# Altium PCB TivaC.PcbDoc (part 1 of 3)
Units mil, origin at the board's own origin, x right, y up, seen from the top; angles counter-clockwise.
Board outline 2000 x 2600 mil, 6 copper layers (L1, L2(GND), L3, L4, L5(PWR), L6), stack 61.068 mil thick; 95 components, 90 nets, 380 pads, 190 vias.
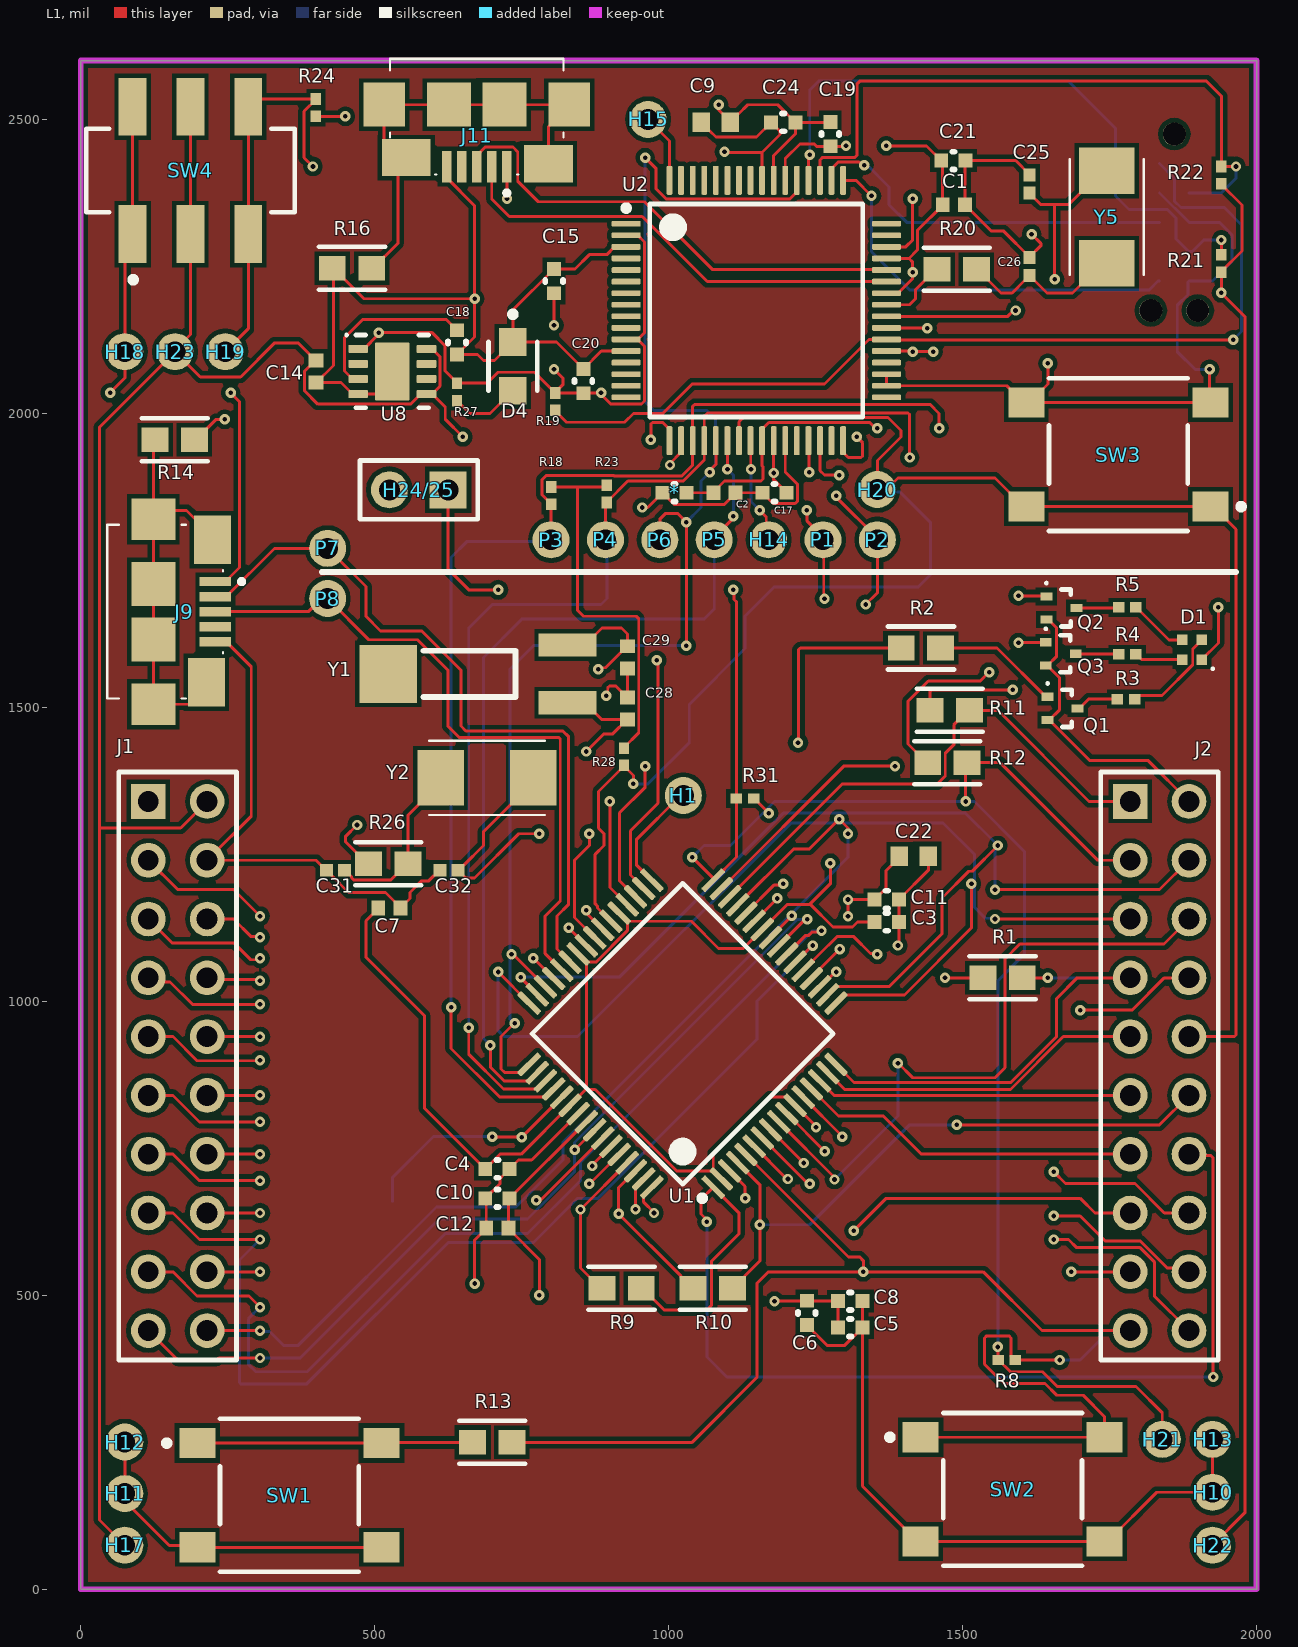
[diagram p0: L1 view]
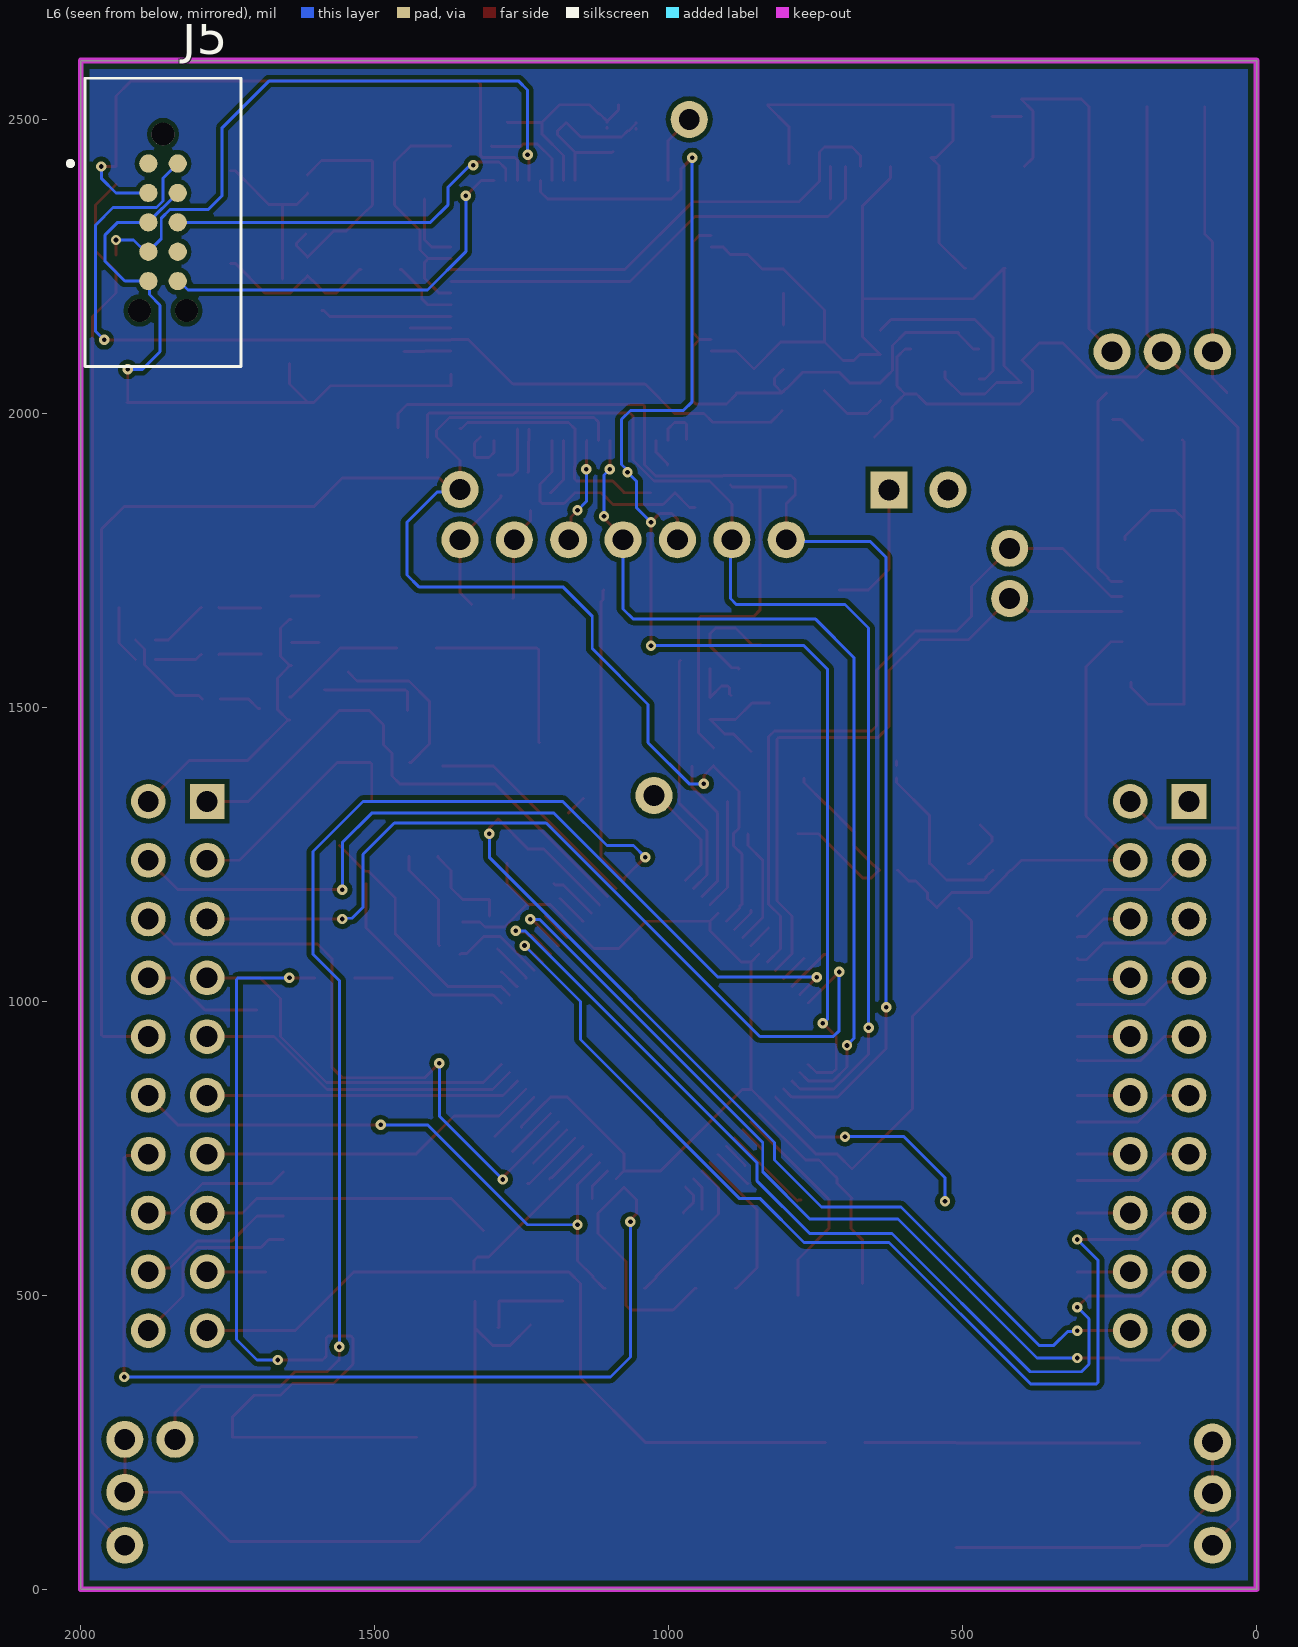
[diagram p1: L6 view, seen from below]
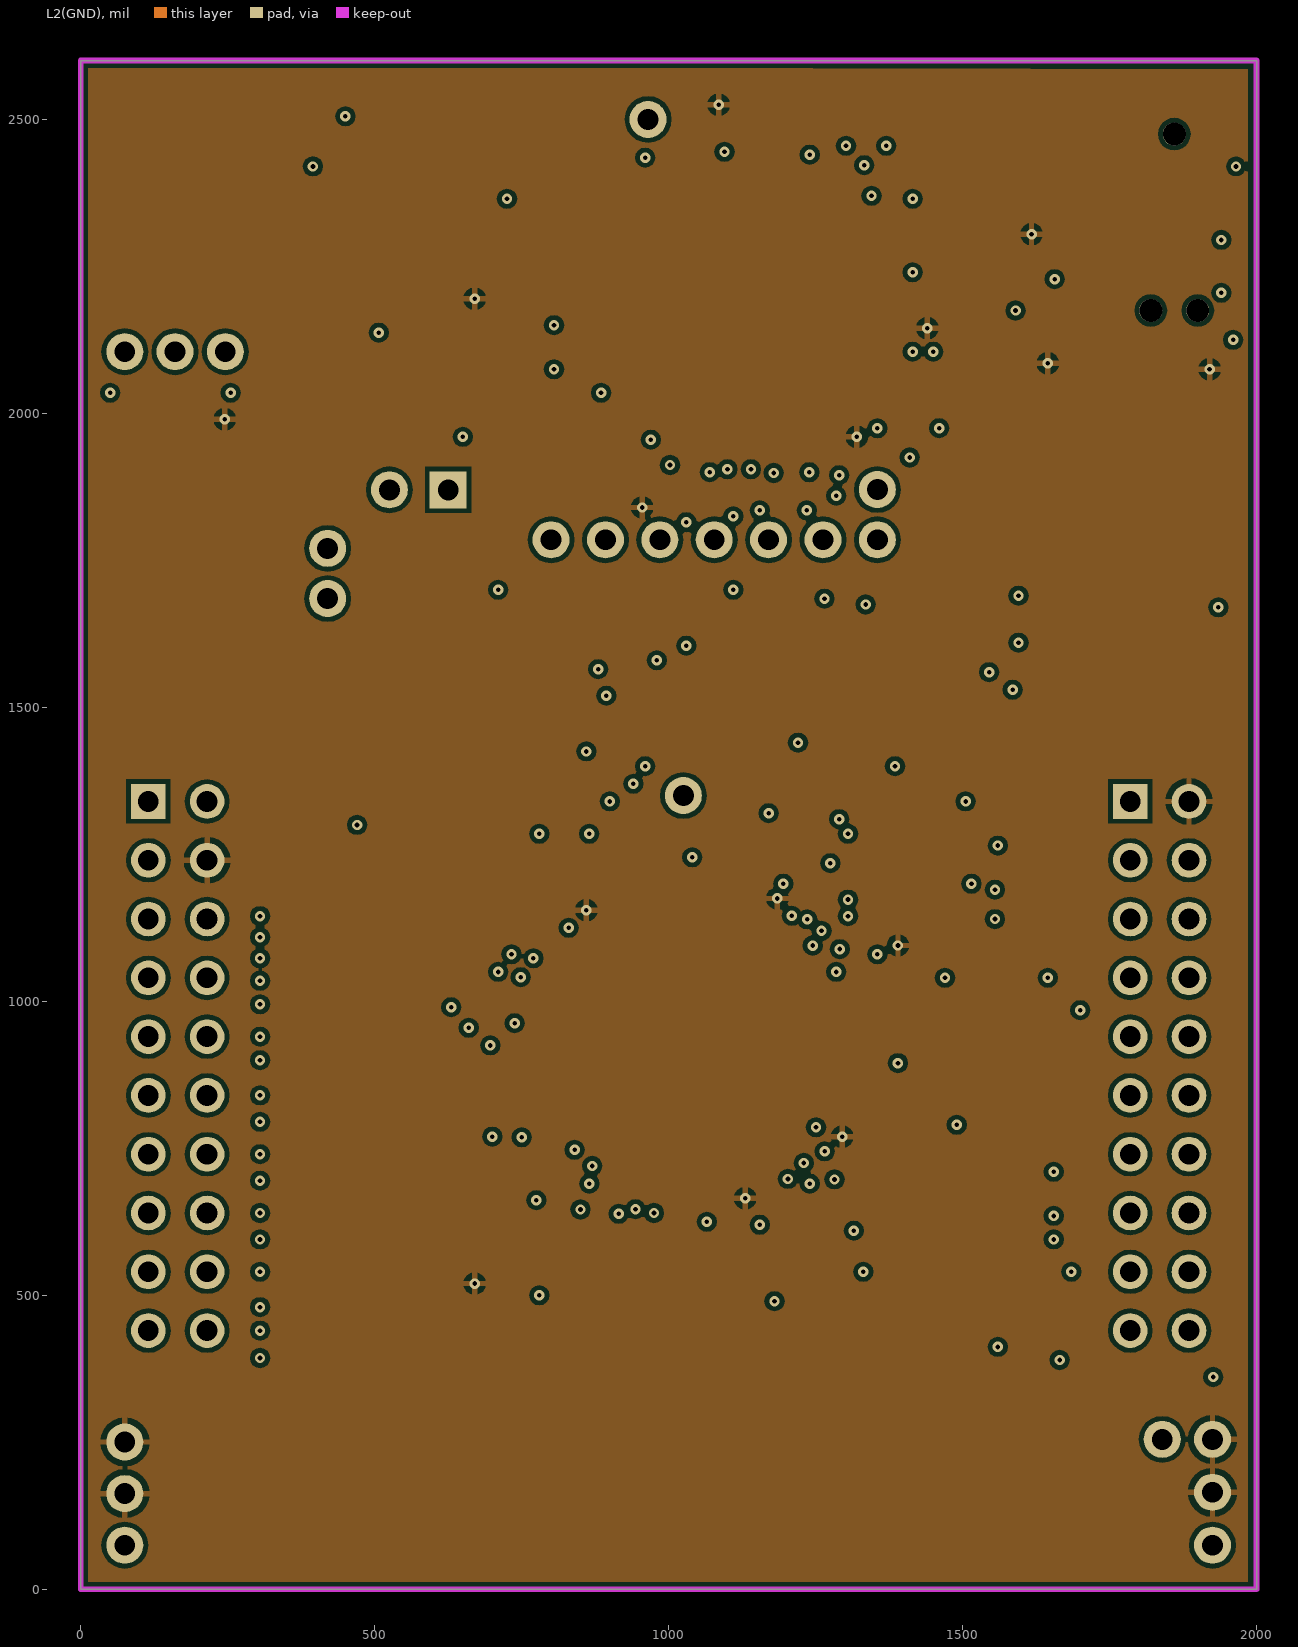
[diagram p2: L2(GND)]
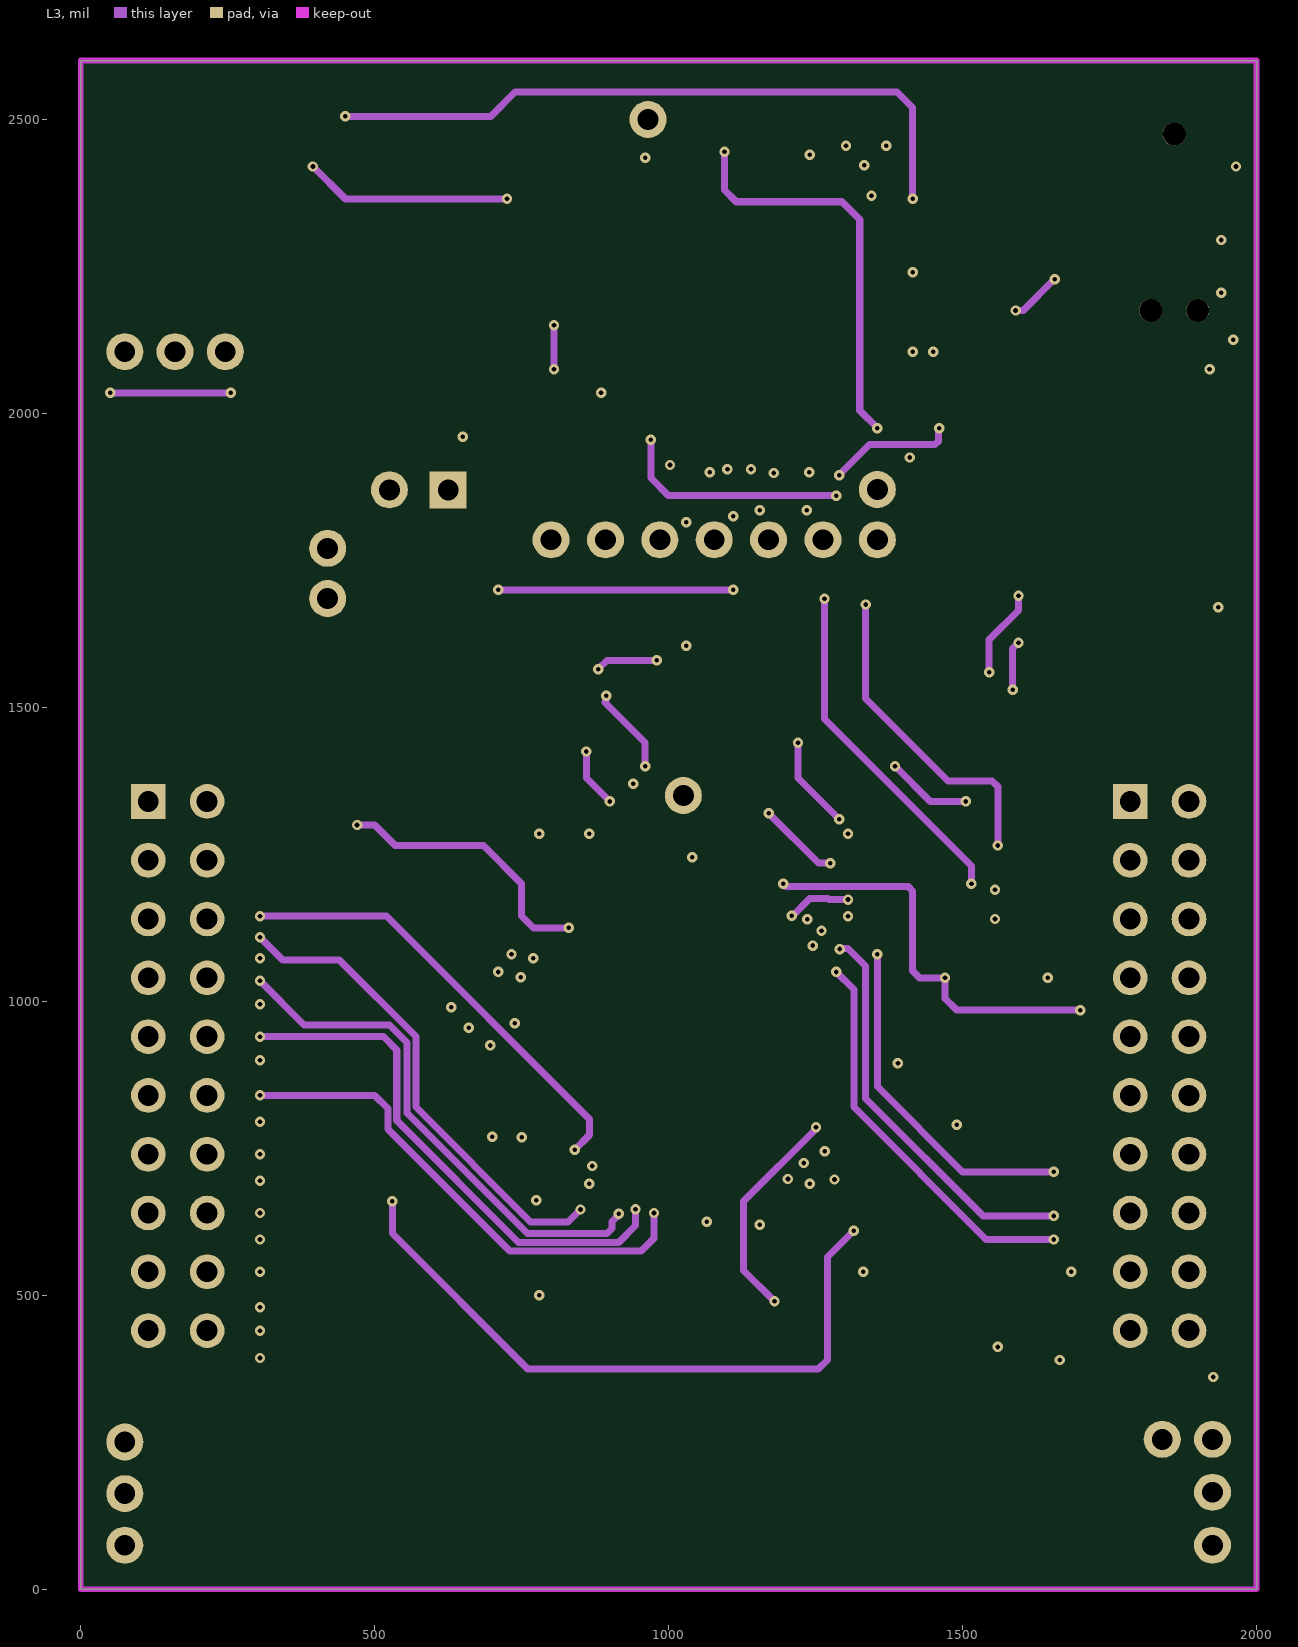
[diagram p3: L3]
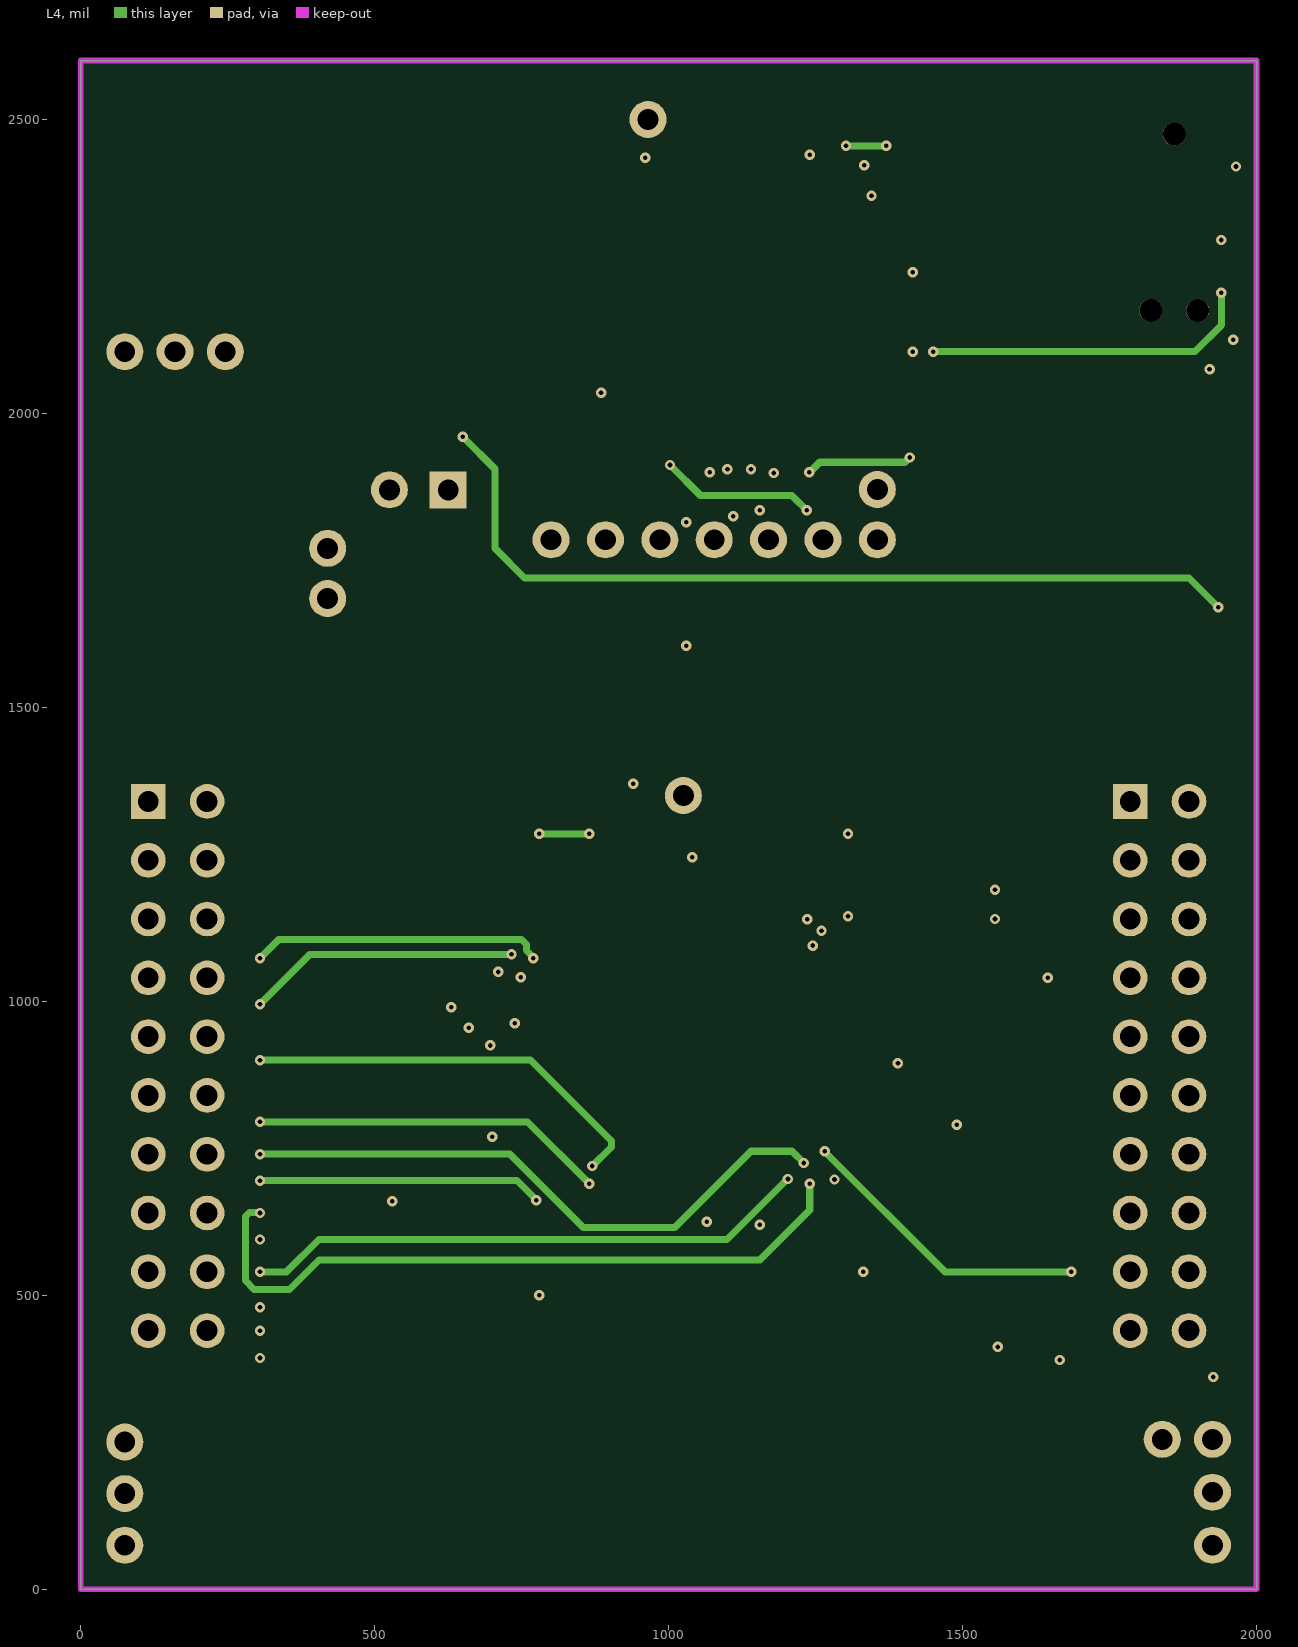
[diagram p4: L4]
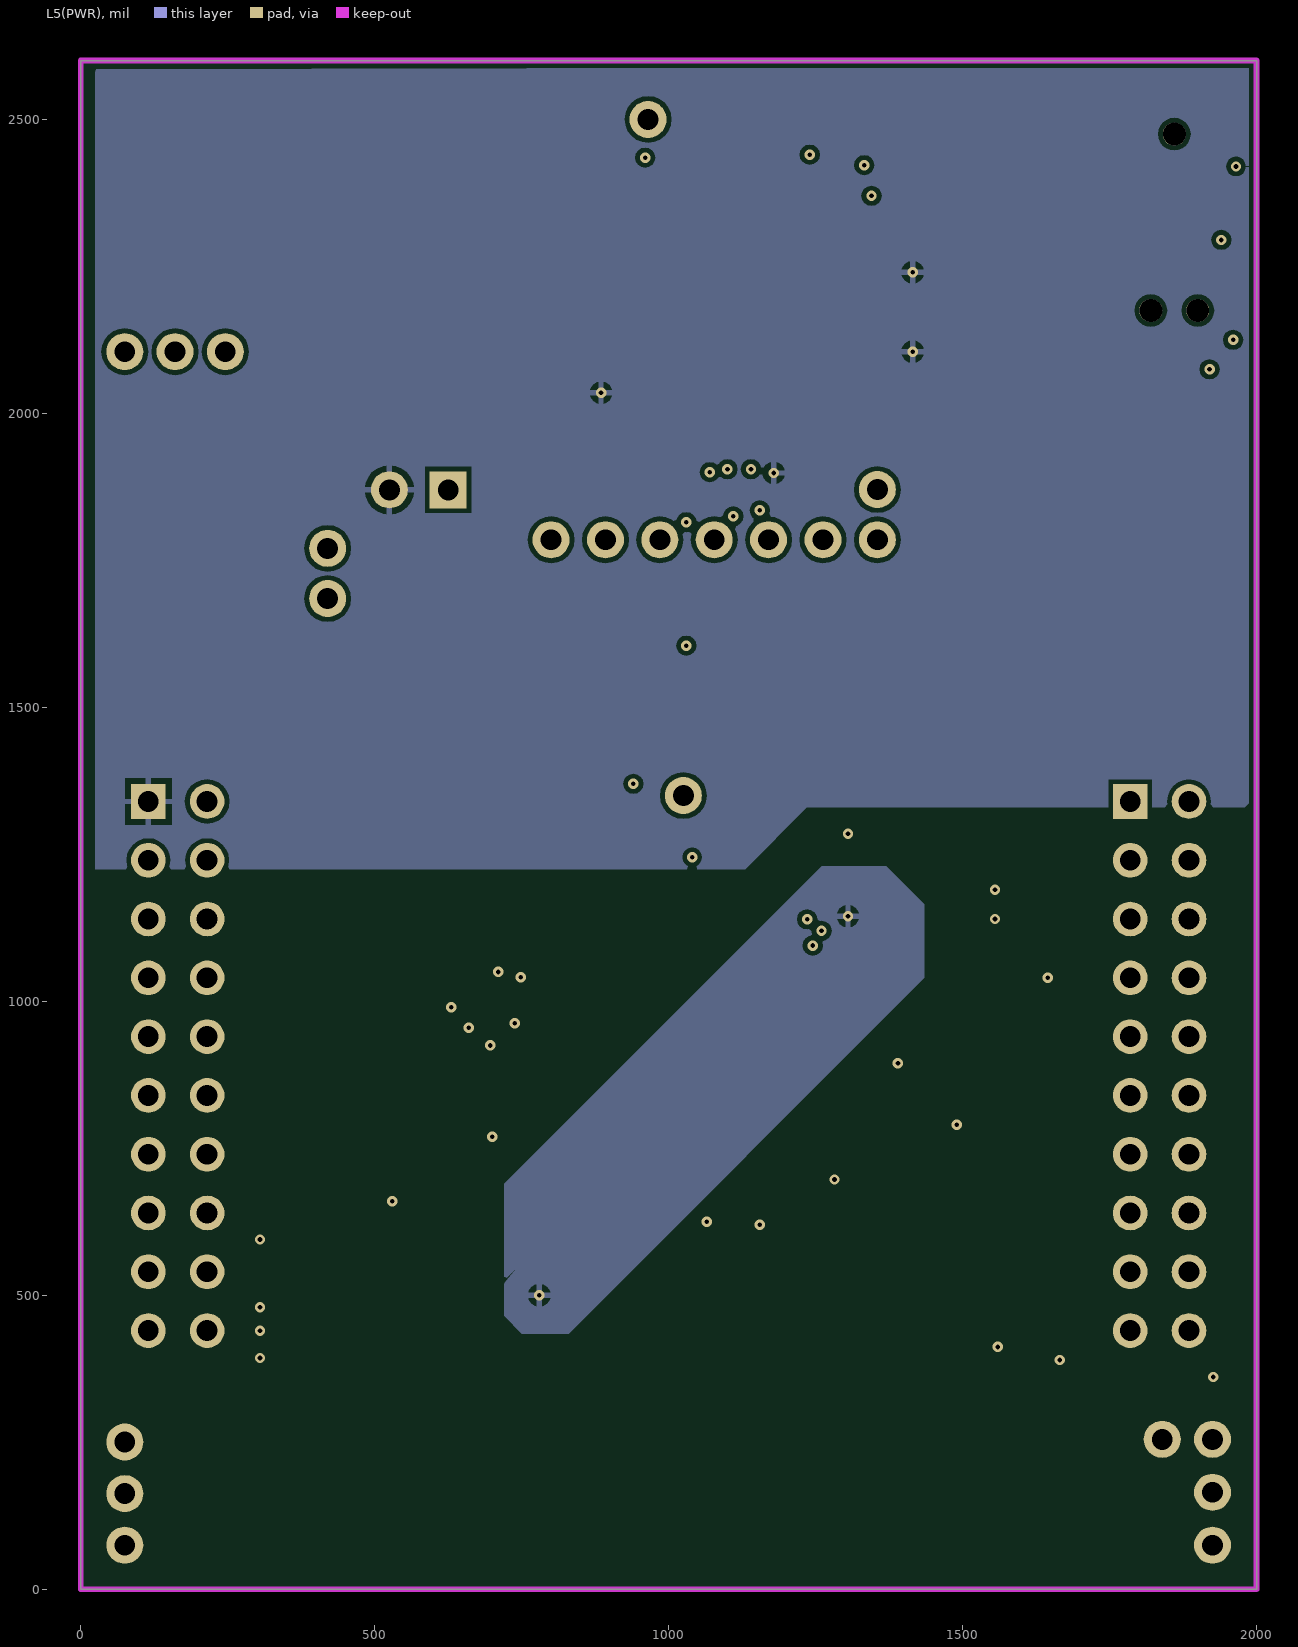
[diagram p5: L5(PWR)]

## Layer stack, top to bottom
Top Solder: solder mask 1, SM-001, Dk 4
L1: signal copper 1.378
Dielectric 1: prepreg 2.8, PP-006, Dk 4.1
Dielectric 2: prepreg 2.8, PP-006, Dk 4.1
L2(GND): signal copper 1.378
Dielectric 3: core 18, Core-035, Dk 4.7
L3: signal copper 1.378
Dielectric 4: prepreg 2.8, PP-006, Dk 4.1
Dielectric 5: prepreg 2.8, PP-006, Dk 4.1
L4: signal copper 1.378
Dielectric 6: core 18, Core-035, Dk 4.7
L5(PWR): signal copper 1.378
Dielectric 7: prepreg 2.8, PP-006, Dk 4.1
Dielectric 8: prepreg 2.8, PP-006, Dk 4.1
L6: signal copper 1.378
Bottom Solder: solder mask 1, SM-001, Dk 4

## Board outline
0,0 0,2600 2000,2600 2000,0

## Design rules (kind name [scope] priority, off if disabled: settings)
Clearance [All] p1: gap=7.87 ignorepadtopadclearanceinfootprint=FALSE except(0: Arc-Text Track-Text SMDPad-Text THPad-Text Via-Text Fill-Text Poly-Text Region-Text Text-Text; 3: Arc-Arc Arc-Track Track-Track; 4: Arc-SMDPad Track-SMDPad; 5.91: SMDPad-SMDPad; 7: Arc-Via Track-Via; 9: Arc-THPad Track-THPad; 15.75: THPad-THPad)
HoleSize [All] p1: absolutevalues=TRUE maxlimit=255.91 minlimit=5.91 maxpercent=80.000 minpercent=20.000
HoleToHoleClearance [All] p1: gap=12 allowstackedmicrovias=TRUE
MinimumAnnularRing [All] p1: minimumring=3.5
MinimumSolderMaskSliver [All] p1: minsoldermaskwidth=1
PolygonConnect [All] p1: connectstyle=Relief reliefconductorwidth=10 reliefentries=4 polygonreliefangle="90 Angle" airgapwidth=10
RoutingVias [All] p1: holewidth=7.87 width=17.72 viastyle="Through Hole" minholewidth=7.87 minwidth=17.72 maxholewidth=19.68 maxwidth=50
SilkToSilkClearance [All] p1: silktosilkclearance=6
SilkToSolderMaskClearance [IsPad] p1: minsilkscreentomaskgap=3.5 clearancetoexposedcopper=TRUE
SolderMaskExpansion [All] p1: expansion=4 istentingtop=FALSE
UnRoutedNet [All] p1: checkbadconnections=TRUE
Width "Width All" [All] p1: maxlimit=12 minlimit=5 preferedwidth=12 toplayer_maxwidth=5 toplayer_prefwidth=5 midlayer1_minwidth=12 midlayer2_minwidth=12 midlayer3_maxwidth=5 midlayer3_prefwidth=5 midlayer4_maxwidth=5 midlayer4_prefwidth=5 bottomlayer_maxwidth=5 bottomlayer_prefwidth=5 minimp=50.000000 maximp=50.000000 favimp=50.000000
24 further rules are at their usual default settings.

## Classes and differential pairs
component class Designator: C3 C4 C5 C6 C7 C8 C11 C14 C18 C22 C28 C29 C31 C32 D4 H1 H10 H11 H12 H13 H17 H18 H19 H20 H21 H22 H23 H24/25 R26 R27 R28 R31 SW3 SW4 U8 Y1 Y2
component class Designator: D1 J1 J2 J9 P1 P2 P3 P4 P5 P6 P7 P8 Q1 Q2 Q3 R1 R2 R3 R4 R5 R8 R9 R10 R11 R12 R13 R14 SW1 SW2 U1
component class Designator: C1 C2 C9 C15 C17 C19 C20 C21 C24 C25 C26 H14 H15 J5 J11 R16 R18 R19 R20 R21 R22 R23 R24 U2 Y5

## Components (designator, comment, footprint, x,y, rotation, side; value= is the part's Value field where it differs from the comment)
* "EMK105B7104KV-F" CAPC1005 1010,1865 r180 top (schematic designator C23)
C1 "capacitor Johanson Dielectrics Inc" "C0402 imperial" 1485,2355 r0 top
C2 "capacitor Johanson Dielectrics Inc" "C0402 imperial" 1094.88,1865 r0 top
C3 "EMK105B7103KV-F" CAPC1005 1371,1135 r0 top
C4 "EMK105B7104KV-F" CAPC1005 708.66,714.93 r0 top
C5 "EMK105B7103KV-F" CAPC1005 1309,445 r0 top
C6 "EMK105B7104KV-F" CAPC1005 1235,470 r270 top
C7 "capacitor Johanson Dielectrics Inc" "C0402 imperial" 525,1158.79 r0 top
C8 "EMK105B7103KV-F" CAPC1005 1309,490 r0 top
C9 "GRM188R61C225KE15D" CAPC1608X90X35LL10T15 1080,2495 r0 top
C10 "EMK105B7104KV-F" CAPC1005 708.66,664.92 r180 top
C11 "EMK105B7104KV-F" CAPC1005 1371,1173 r0 top
C12 "capacitor Johanson Dielectrics Inc" "C0402 imperial" 708.66,614.24 r180 top
C14 "capacitor Johanson Dielectrics Inc" "C0402 imperial" 400,2071.34 r270 top
C15 "EMK105B7103KV-F" CAPC1005 805,2225 r90 top
C17 "EMK105B7104KV-F" CAPC1005 1180,1865 r180 top
C18 "EMK105B7103KV-F" CAPC1005 640,2120.67 r270 top
C19 "EMK105B7103KV-F" CAPC1005 1275,2475 r90 top
C20 "EMK105B7104KV-F" CAPC1005 855,2055 r90 top
C21 "EMK105B7103KV-F" CAPC1005 1484.33,2430 r0 top
C22 "GRM188R61C225KE15D" CAPC1608X90X35LL10T15 1417,1247 r0 top
C24 "EMK105B7104KV-F" CAPC1005 1195,2495 r0 top
C25 "GRM1555C1H100JZ01D" CAPC1005X55X25LL05T10 1613.93,2390.35 r90 top
C26 "GRM1555C1H100JZ01D" CAPC1005X55X25LL05T10 1613.93,2250 r90 top
C28 "Capacitor" "C0402 imperial" 930,1498.22 r90 top
C29 "Capacitor" "C0402 imperial" 930,1585 r90 top
C31 "GRM1555C1H100JZ01D" CAPC1005X55X25LL05T10 433.19,1223 r180 top
C32 "GRM1555C1H100JZ01D" CAPC1005X55X25LL05T10 626.19,1223 r180 top
D1 "RSGHBHC1" "RGB LED" 1890,1598 r0 top
D4 "Green" FP-LTST-C171GKT-MFG 735,2080 r270 top
H1 "header" "HEADER 1"#1 1025,1350 r0 top
H10 "header" "HEADER 1"#1 1925,165 r0 top
H11 "header" "HEADER 1"#1 75,162.72 r0 top
H12 "header" "HEADER 1"#1 75,250.44 r0 top
H13 "header" "HEADER 1"#1 1925,255 r0 top
H14 "header" "HEADER 1"#1 1170,1785 r0 top
H15 "header" "HEADER 1"#1 965,2500 r0 top
H17 "header" "HEADER 1"#1 75,75 r0 top
H18 "header" "HEADER 1"#1 75,2105 r0 top
H19 "header" "HEADER 1"#1 245.89,2105 r0 top
H20 "header" "HEADER 1"#1 1355,1870.44 r90 top
H21 "header" "HEADER 1"#2 1868.56,196 r0 top
H22 "header" "HEADER 1"#1 1925,75 r90 top
H23 "header" "HEADER 1"#1 160.44,2105 r90 top
H24/25 "Header 2" HDR1X2 625,1870 r180 top
J1 "Header 20" HDR2X10 115,1340 r270 top
J2 "Header 20" HDR2X10 1785,1340 r270 top
J5 "TC2050-IDC-NL" TAG-CONNECT_TC2050-IDC-NL 1885,2425 r180 bottom
J9 "ZX62-B-5PA" ZX62B5PA 123.54,1662.76 r270 top
J11 "ZX62-B-5PA" ZX62B5PA 673.56,2525 r180 top
P1 "header" "HEADER 1"#1 1262.5,1785 r0 top
P2 "header" "HEADER 1"#1 1355,1785 r0 top
P3 "header" "HEADER 1"#1 800,1785 r0 top
P4 "header" "HEADER 1"#1 892.5,1785 r0 top
P5 "header" "HEADER 1"#1 1077.5,1785 r0 top
P6 "header" "HEADER 1"#1 985,1785 r0 top
P7 "header" "HEADER 1"#1 420,1770.44 r0 top
P8 "header" "HEADER 1"#1 420,1685 r0 top
Q1 "DTC114EET1G" ONSC-SC-75-3-463-01_V 1670,1498.19 r0 top
Q2 "DTC114EET1G" ONSC-SC-75-3-463-01_V 1668,1669 r0 top
Q3 "DTC114EET1G" ONSC-SC-75-3-463-01_V 1667,1591 r0 top
R1 "ERJ-3GEY0R00V" FP-ERJ-3GEY0R00V-IPC_A 1568,1040 r0 top
R2 "ERJ-3GEY0R00V" FP-ERJ-3GEY0R00V-IPC_A 1429,1601 r0 top
R3 "RC0402FR-07330RL" RESC1005X40X25LL05T10 1778,1514 r0 top
R4 "RC0402FR-07330RL" RESC1005X40X25LL05T10 1780,1590 r0 top
R5 "RC0402FR-07330RL" RESC1005X40X25LL05T10 1780,1670 r0 top
R8 "RC0402FR-07330RL" RESC1005X40X25LL05T10 1575,390 r180 top
R9 "ERJ-3GEY0R00V" FP-ERJ-3GEY0R00V-IPC_A 920,512 r180 top
R10 "ERJ-3GEY0R00V" FP-ERJ-3GEY0R00V-IPC_A 1075,512 r180 top
R11 "ERJ-3GEY0R00V" FP-ERJ-3GEY0R00V-IPC_A 1478,1495 r180 top
R12 "ERJ-3GEY0R00V" FP-ERJ-3GEY0R00V-IPC_A 1474,1406 r180 top
R13 "ERJ-3GEY0R00V" FP-ERJ-3GEY0R00V-IPC_A 700,250 r180 top
R14 "ERJ-3GEY0R00V" FP-ERJ-3GEY0R00V-IPC_A 160,1955 r0 top
R16 "ERJ-3GEY0R00V" FP-ERJ-3GEY0R00V-IPC_A 461.51,2246.92 r180 top
R18 "RC0402FR-0710KL" RESC1005X40X25LL05T10 800,1860 r270 top
R19 "RC0402FR-0710KL" RESC1005X40X25LL05T10 807.02,2020 r270 top
R20 "ERJ-3GEY0R00V" FP-ERJ-3GEY0R00V-IPC_A 1490,2245 r0 top
R21 "RC0402FR-0710KL" RESC1005X40X25LL05T10 1940,2255 r90 top
R22 "RC0402FR-0710KL" RESC1005X40X25LL05T10 1940,2405.24 r90 top
R23 "RC0402FR-0710KL" RESC1005X40X25LL05T10 895,1863.24 r270 top
R24 "RC0402FR-07330RL" RESC1005X40X25LL05T10 400,2520 r270 top
R26 "ERJ-3GEY0R00V" FP-ERJ-3GEY0R00V-IPC_A 523.19,1234 r0 top
R27 "RC0402FR-07330RL" RESC1005X40X25LL05T10 640,2036.57 r90 top
R28 "RC0402FR-0710KL" RESC1005X40X25LL05T10 924,1416 r90 top
R31 "MCR01MRTF1004" RESC1005X40X25LL05T10 1130,1345 r180 top
SW1 "B3S-1000" OMRON-B3S-1000-4_V 355,160 r0 top
SW2 "B3S-1000" OMRON-B3S-1000-4_V 1585,170 r0 top
SW3 "B3S-1000" OMRON-B3S-1000-4_V 1765,1930 r180 top
SW4 "JS202011SCQN" FP-JS202011SCQN-MFG 186.57,2413.27 r0 top
U1 "TM4C123GH6PMIR" PM0064A_L 1023.62,944.88 r135 top
U2 "TM4C123GH6PMIR" PM0064A_L 1149.12,2175 r0 top
U8 "TPS73633DRBT" DRB0008A_V 530,2071.34 r0 top
Y1 "AB26TRB-32.768KHZ-T" AB26TRB 523,1557 r0 top
Y2 "NX5032GA-16.000000MHZ" NX5032GA16000000MHZLNCD1 691,1380 r0 top
Y5 "NX5032GA-16.000000MHZ" NX5032GA16000000MHZLNCD1 1745,2333.99 r90 top

## Footprints (in the part's own frame and the unit in brackets; to place one, negate y for a bottom-side part, rotate by r counter-clockwise, add the part's x,y. Pads: shape width x height; smd on the part's side, far side on the other; paste and mask are expansions set on the pad)
AB26TRB [mm]
  rect 2.5x1 smd: 1(7.75,-1.25) 2(7.75,1.25)
  rect 2.5x2.5 smd: 3(0,0)
  silkscreen extent 1.53,-1 5.5,1, body extent -0.67,-1.4 8.33,1.4, height 2
"C0402 imperial" [mm] "Chip Capacitor, 2-Leads, Body 1.00x0.50mm, IPC Medium Density"
  rect 0.6x0.64 smd: 1(-0.48,0) 2(0.48,0)
  body extent -0.5,-0.25 0.5,0.25, height 0.35
CAPC1005 [mm] "Chip Capacitor 1005"
  rect 0.6x0.6 smd: 1(-0.525,0) 2(0.525,0)
  silkscreen extent -0.05,-0.38 0.05,0.38, body extent -0.57,-0.3 0.57,0.3, height 0.2
CAPC1005X55X25LL05T10 [mm] "Chip Capacitor, 2-Leads, Body 1.00x0.50mm, IPC High Density"
  rect 0.56x0.52 smd: 1(-0.39,0) 2(0.39,0)
  body extent -0.53,-0.28 0.53,0.28, height 0.55
CAPC1608X90X35LL10T15 [mm] "Chip Capacitor, 2-Leads, Body 1.60x0.80mm, IPC High Density"
  rect 0.75x0.85 smd: 1(-0.625,0) 2(0.625,0)
  body extent -0.85,-0.45 0.85,0.45, height 0.9
DRB0008A_V [mm] "SON, 8-Leads, Body 3x3mm, Pitch 0.65mm, Thermal Pad 1.50 x 3.8mm"
  rrect29% 0.85x0.35 smd: 1(-1.475,0.975) 2(-1.475,0.325) 3(-1.475,-0.325) 4(-1.475,-0.975) 5(1.475,-0.975) 6(1.475,-0.325) 7(1.475,0.325) 8(1.475,0.975)
  rrect7% 1.5x2.5 smd: 9(0,0)
  silkscreen extent -2.02,-1.58 1.57,1.62, body extent -1.5,-1.5 1.5,1.5, height 1
FP-ERJ-3GEY0R00V-IPC_A [mil]
  rect 45.53x41.82 smd paste+0 mask+0: 1(-33.5,0) 2(33.5,0)
  silkscreen extent -56,-37 56,37, body extent -76,-41 76,41, height 10
FP-JS202011SCQN-MFG [mm]
  rect 1.2x2.5 smd paste+0 mask+0: 1(-2.5,-2.75) 2(0,-2.75) 3(2.5,-2.75) 4(-2.5,2.75) 5(0,2.75) 6(2.5,2.75)
  silkscreen extent -4.5,-4.85 4.5,1.8, body extent -4.5,-3.63 4.5,3.37, height 5.65
FP-LTST-C171GKT-MFG [mm]
  rect 1.2x1.2 smd paste+0 mask+0: 1(-1.05,0) 2(1.05,0)
  silkscreen extent -2.37,-1.05 1.05,1.05, body extent -1.75,-0.77 1.75,0.77, height 0.25
HDR1X2 [mm] "Connector; Header; 2 Position"
  rect 1.6x1.6 hole 0.9: 1(0,0)
  round 1.6 hole 0.9: 2(2.54,0)
  silkscreen extent -1.27,-1.27 3.81,1.27, body extent -1.36,-1.27 3.84,1.27, height 8.6
HDR2X10 [mm] "Connector; Header; 10x2 Position"
  rect 1.5x1.5 hole 0.9: 1(0,0)
  round 1.5 hole 0.9: 2(0,2.54) 3(2.54,0) 4(2.54,2.54) 5(5.08,0) 6(5.08,2.54) 7(7.62,0) 8(7.62,2.54) 9(10.16,0) 10(10.16,2.54) 11(12.7,0) 12(12.7,2.54) 13(15.24,0) 14(15.24,2.54) 15(17.78,0) 16(17.78,2.54) 17(20.32,0) 18(20.32,2.54) 19(22.86,0) 20(22.86,2.54)
  silkscreen extent -1.27,-1.27 24.13,3.81, body extent -1.27,-1.27 24.13,3.81, height 8.64
"HEADER 1"#1 [mm]
  round 1.6 hole 0.9: 1(0,0)
"HEADER 1"#2 [mm]
  round 1.6 hole 0.9: 1(-0.737,1.499)
NX5032GA16000000MHZLNCD1 [mm]
  rect 2x2.4 smd: 1(-2,0) 2(2,0)
  silkscreen extent -2.5,-1.6 2.5,1.6, body extent -2.8,-1.6 2.8,1.6, height 1.6
OMRON-B3S-1000-4_V [mm] "SMD, 4-Leads, Body 6.6x6mm"
  rect 1.55x1.3 smd: 1(-3.975,2.25) 2(3.975,2.25) 3(-3.975,-2.25) 4(3.975,-2.25)
  silkscreen extent -5.42,-3.3 3,3.3, body extent -4.5,-3.3 4.5,3.3, height 4.4
ONSC-SC-75-3-463-01_V [mil] "SOT23, 3-Leads, Body 1.6x0.8mm, Pitch 0.5mm"
  rect 20x14.02 smd: 1(-25.49,19.68) 2(-25.49,-19.69) 3(25.49,0)
  silkscreen extent -27,-31 16,44, body extent -16,-31 16,31, height 35
PM0064A_L [mm] "QFP, 64-Leads, Body 10x10mm, Pitch 0.5mm, IPC High Density"
  rrect40% 1.25x0.25 smd: 1(-5.625,3.75) 2(-5.625,3.25) 3(-5.625,2.75) 4(-5.625,2.25) 5(-5.625,1.75) 6(-5.625,1.25) 7(-5.625,0.75) 8(-5.625,0.25) 9(-5.625,-0.25) 10(-5.625,-0.75) 11(-5.625,-1.25) 12(-5.625,-1.75) 13(-5.625,-2.25) 14(-5.625,-2.75) 15(-5.625,-3.25) 16(-5.625,-3.75) 33(5.625,-3.75) 34(5.625,-3.25) 35(5.625,-2.75) 36(5.625,-2.25) 37(5.625,-1.75) 38(5.625,-1.25) 39(5.625,-0.75) 40(5.625,-0.25) 41(5.625,0.25) 42(5.625,0.75) 43(5.625,1.25) 44(5.625,1.75) 45(5.625,2.25) 46(5.625,2.75) 47(5.625,3.25) 48(5.625,3.75)
  rrect40% 0.25x1.25 smd: 17(-3.75,-5.625) 18(-3.25,-5.625) 19(-2.75,-5.625) 20(-2.25,-5.625) 21(-1.75,-5.625) 22(-1.25,-5.625) 23(-0.75,-5.625) 24(-0.25,-5.625) 25(0.25,-5.625) 26(0.75,-5.625) 27(1.25,-5.625) 28(1.75,-5.625) 29(2.25,-5.625) 30(2.75,-5.625) 31(3.25,-5.625) 32(3.75,-5.625) 49(3.75,5.625) 50(3.25,5.625) 51(2.75,5.625) 52(2.25,5.625) 53(1.75,5.625) 54(1.25,5.625) 55(0.75,5.625) 56(0.25,5.625) 57(-0.25,5.625) 58(-0.75,5.625) 59(-1.25,5.625) 60(-1.75,5.625) 61(-2.25,5.625) 62(-2.75,5.625) 63(-3.25,5.625) 64(-3.75,5.625)
  silkscreen extent -5.75,-4.6 4.6,4.6, body extent -6,-6 6,6, height 1.49
RESC1005X40X25LL05T10 [mm] "Chip Resistor, 2-Leads, Body 1.00x0.50mm, IPC High Density"
  rect 0.5x0.45 smd: 1(-0.375,0) 2(0.375,0)
  body extent -0.53,-0.27 0.53,0.28, height 0.4
"RGB LED" [mm]
  rect 0.45x0.45 smd: 1(0.425,-0.425) 2(0.425,0.425) 3(-0.425,0.425) 4(-0.425,-0.425)
  silkscreen extent 0.85,-0.87 0.95,-0.77, body extent -0.5,-0.5 0.5,0.5, height 0.35
TAG-CONNECT_TC2050-IDC-NL [mm]
  round 0.787 smd paste-1: 1(0,0) 2(0,-1.27) 3(0,-2.54) 4(0,-3.81) 5(0,-5.08) 6(1.27,-5.08) 7(1.27,-3.81) 8(1.27,-2.54) 9(1.27,-1.27) 10(1.27,0)
  round 0.991 hole 0.991 unplated: ""(-0.38,-6.35) ""(0.635,1.27) ""(1.65,-6.35)
  silkscreen extent -3.46,-8.76 4,3.68
ZX62B5PA [mm]
  rect 0.4x1.35 smd: 1(-1.3,2.675) 2(-0.65,2.675) 3(0,2.675) 4(0.65,2.675) 5(1.3,2.675)
  rect 2.1x1.6 smd: S1(-3.1,2.549) S2(3.048,2.286)
  rect 1.8x1.9 smd: S3(-4,0) S6(4,0)
  rect 1.9x1.9 smd: S4(-1.2,0) S5(1.2,0)
  silkscreen extent -3.75,-1.99 3.75,3.91, body extent -4.04,-2.55 4.04,3.05, height 2.73

## Part data
* C4 C6 C10 C11 C17 C20 C24: "TAIYO YUDEN - EMK105B7104KV-F - SMD Multilayer Ceramic Capacitor, 0.1 &#181;F, 16 V, 0402 [1005 Metric], &#177; 10%, X7R, M Series", Capacitance=100nF, Case Code (Imperial)=0402, Case Code (Metric)=1005, Dielectric=X7R, Manufacturer="Taiyo Yuden", Max Operating Temperature=125°C, Min Operating Temperature=-55°C, Package Quantity=1, Resistor Type=Ceramic, Supplier Part Number 1=587-1451-1-ND, Tolerance=10%, Voltage Rating=16V, Case/Package=0402, ComponentLink1Description=https://datasheet.ciiva.com/129/emk105b7104kv-f-ss-129714.pdf?src-supplier=Digi-Key, ComponentLink1URL=https://datasheet.ciiva.com/129/emk105b7104kv-f-ss-129714.pdf?src-supplier=Digi-Key, ComponentLink2Description=https://datasheet.ciiva.com/30227/emk105b7104kv-f-30227394.pdf?src-supplier=Onlinecomponents.com, ComponentLink2URL=https://datasheet.ciiva.com/30227/emk105b7104kv-f-30227394.pdf?src-supplier=Onlinecomponents.com, ComponentLink3Description=https://datasheet.ciiva.com/22748/746258-22748959.pdf?src-supplier=Element14, ComponentLink3URL=https://datasheet.ciiva.com/22748/746258-22748959.pdf?src-supplier=Element14, Construction=Flat, Depth=0.5mm, Halogen Free="Halogen Free", Height=0.5mm, Lead Free="Lead Free", Length=1mm, Manufacturer Part Number=EMK105B7104KV-F, Mount="Surface Mount", Number of Pins=2, Packaging="Tape and Reel", Pricing 1="1 = 0.10000, 10 = 0.02400, 50 = 0.01320, 100 = 0.01070, 500 = 0.00764, 1000 = 0.00601, 2500 = 0.00546, 5000 = 0.00503 (USD)", Radiation Hardening=No, REACH SVHC=Unknown, RoHS=Yes, RoHS Compliant=Yes, Series=M, Stock 1=5046270, Supplier 1=Digi-Key, Termination=SMD/SMT, Thickness=0.022inch, Voltage Rating (DC)=16V, Width=0.02inch
C1 C2 C7 C12 C14: library part 100R07X105KV4T, "Cap Ceramic 1uF 10V X5R 10% SMD 0402 85C T/R", Capacitance=1uF, Case Code (Imperial)=0402, Case Code (Metric)=1005, Dielectric=X5R, Manufacturer=Johanson, Max Operating Temperature=85°C, Min Operating Temperature=-55°C, Package Quantity=10000, Supplier Part Number 1=605-100R07X105KV4T, Tolerance=10%, Voltage Rating=10V, Case/Package=0402, ComponentLink1Description=https://datasheet.ciiva.com/26948/getdatasheetpartid-789067-26948543.pdf?src-supplier=Verical, ComponentLink1URL=https://datasheet.ciiva.com/26948/getdatasheetpartid-789067-26948543.pdf?src-supplier=Verical, ComponentLink2Description=https://datasheet.ciiva.com/22693/jdi-full-catalog-2012-01-22693744.pdf?src-supplier=Element14, ComponentLink2URL=https://datasheet.ciiva.com/22693/jdi-full-catalog-2012-01-22693744.pdf?src-supplier=Element14, Depth=0.51mm, Height=0.64mm, Length=1.02mm, Manufacturer Part Number=100R07X105KV4T, Mount="Surface Mount", Number of Pins=2, Packaging="Tape and Reel", Pricing 1="1 = 0.26000, 10 = 0.13400, 50 = 0.13400, 100 = 0.07600, 1000 = 0.04900, 10000 = 0.04000 (USD)", Radiation Hardening=No, REACH SVHC="No SVHC", RoHS=Yes, RoHS Compliant=Yes, Series=TANCERAM®, Stock 1=173156, Supplier 1=Mouser, Termination=SMD/SMT, Thickness=0.025inch, Voltage Rating (DC)=10V, Weight=2.3E-05oz, Width=0.02inch
C3 C5 C8 C15 C18 C19 C21: "TAIYO YUDEN   EMK105B7103KV-F   CERAMIC CAPACITOR, 0.01UF, 16V, X7R, 10%, 0402, FULL REEL", Capacitance=10nF, Case Code (Imperial)=0402, Case Code (Metric)=1005, Dielectric=X7R, Manufacturer="Taiyo Yuden", Max Operating Temperature=125°C, Min Operating Temperature=-55°C, Package Quantity=1, Resistor Type=Ceramic, Supplier Part Number 1=587-2708-1-ND, Tolerance=10%, Voltage Rating=16V, Case/Package=0402, ComponentLink1Description=https://datasheet.ciiva.com/156/mlcc-all-e-156078.pdf?src-supplier=Digi-Key, ComponentLink1URL=https://datasheet.ciiva.com/156/mlcc-all-e-156078.pdf?src-supplier=Digi-Key, ComponentLink2Description=https://datasheet.ciiva.com/156/mlcc-all-e-156079.pdf?src-supplier=Digi-Key, ComponentLink2URL=https://datasheet.ciiva.com/156/mlcc-all-e-156079.pdf?src-supplier=Digi-Key, ComponentLink3Description=https://datasheet.ciiva.com/156/mlcc-all-e-156080.pdf?src-supplier=Digi-Key, ComponentLink3URL=https://datasheet.ciiva.com/156/mlcc-all-e-156080.pdf?src-supplier=Digi-Key, ComponentLink4Description=https://datasheet.ciiva.com/11596/mlcc01-e-11596553.pdf?src-supplier=Avnet, ComponentLink4URL=https://datasheet.ciiva.com/11596/mlcc01-e-11596553.pdf?src-supplier=Avnet, ComponentLink5Description=https://datasheet.ciiva.com/28644/746258-28644943.pdf?src-supplier=Element14, ComponentLink5URL=https://datasheet.ciiva.com/28644/746258-28644943.pdf?src-supplier=Element14, ComponentLink6Description=https://datasheet.ciiva.com/7975/1481447-7975594.pdf?src-supplier=Element14, ComponentLink6URL=https://datasheet.ciiva.com/7975/1481447-7975594.pdf?src-supplier=Element14, Construction=Flat, Contact Plating=Tin, Depth=0.5mm, Height=0.5mm, Length=1mm, Manufacturer Part Number=EMK105B7103KV-F, Mount="Surface Mount", Number of Pins=2, Packaging="Tape and Reel", Pricing 1="1 = 0.10000, 10 = 0.02500, 50 = 0.01380, 100 = 0.01130, 500 = 0.00804, 1000 = 0.00632, 2500 = 0.00575, 5000 = 0.00529 (USD)", Radiation Hardening=No, REACH SVHC=Unknown, RoHS=Yes, RoHS Compliant=Yes, Series=M, Stock 1=171674, Supplier 1=Digi-Key, Termination=SMD/SMT, Thickness=0.022inch, Voltage Rating (DC)=16V, Width=0.02inch
C9 C22: "Cap Ceramic 2.2uF 16V X5R 10% SMD 0603 85C Paper T/R", Capacitance=2.2uF, Case Code (Imperial)=0603, Case Code (Metric)=1608, Dielectric=X5R, Manufacturer=Murata, Max Operating Temperature=85°C, Min Operating Temperature=-55°C, Package Quantity=1, Supplier Part Number 1=1735526, Tolerance=10%, Voltage=16V, Case/Package=0603, ComponentLink1Description=https://datasheet.ciiva.com/135/grm188r61c225ke15-01-135062.pdf?src-supplier=Digi-Key, ComponentLink1URL=https://datasheet.ciiva.com/135/grm188r61c225ke15-01-135062.pdf?src-supplier=Digi-Key, ComponentLink2Description=https://datasheet.ciiva.com/135/grm188r61c225ke15-01-135063.pdf?src-supplier=Digi-Key, ComponentLink2URL=https://datasheet.ciiva.com/135/grm188r61c225ke15-01-135063.pdf?src-supplier=Digi-Key, ComponentLink3Description=https://datasheet.ciiva.com/5417/product-5417088.pdf?src-supplier=Mouser, ComponentLink3URL=https://datasheet.ciiva.com/5417/product-5417088.pdf?src-supplier=Mouser, ComponentLink4Description=https://datasheet.ciiva.com/3777/147grm188r61c225ke1523-3777042.pdf?src-supplier=Arrow+Electronics, ComponentLink4URL=https://datasheet.ciiva.com/3777/147grm188r61c225ke1523-3777042.pdf?src-supplier=Arrow+Electronics, ComponentLink5Description=https://datasheet.ciiva.com/29199/454457-da-01-en-vs-kondensator-0603-29199689.pdf?src-supplier=Conrad, ComponentLink5URL=https://datasheet.ciiva.com/29199/454457-da-01-en-vs-kondensator-0603-29199689.pdf?src-supplier=Conrad, ComponentLink6Description=https://datasheet.ciiva.com/135/grm188r61c225ke15-01-135061.pdf?src-supplier=Digi-Key, ComponentLink6URL=https://datasheet.ciiva.com/135/grm188r61c225ke15-01-135061.pdf?src-supplier=Digi-Key, ComponentLink7Description=https://datasheet.ciiva.com/16369/product-16369274.pdf?src-supplier=Future+Electronics, ComponentLink7URL=https://datasheet.ciiva.com/16369/product-16369274.pdf?src-supplier=Future+Electronics, Depth=0.8mm, Height=0.8mm, Lead Free="Lead Free", Length=1.6mm, Manufacturer Part Number=GRM188R61C225KE15D, Material=Ceramic, Mount="Surface Mount", Packaging="Tape and Reel", Pricing 1="10 = 0.13600, 100 = 0.08010, 500 = 0.05040, 1000 = 0.04260, 2000 = 0.03240 (GBP)", Radiation Hardening=No, REACH SVHC="No SVHC", RoHS=Yes, RoHS Compliant=Yes, Stock 1=0, Supplier 1=Farnell, Termination=SMD/SMT, Thickness=0.035inch, Voltage Rating=16V, Voltage Rating (DC)=16V, Width=0.8mm
C25 C26 C31 C32: "CAP, CERAMIC, 10PF, 50V, C0G/NP0, 0402", Capacitance=10pF, Case Code (Imperial)=0402, Case Code (Metric)=1005, Dielectric=C0G, Dielectric Material=Ceramic, Insulation Resistance=10GR, Manufacturer=Murata, Max Operating Temperature=125°C, Min Operating Temperature=-55°C, Package Quantity=1, Supplier Part Number 1=1118131, Temperature Coefficient=30ppm/°C, Tolerance=5%, Voltage=50V, Case/Package=0402, ComponentLink1Description=https://datasheet.ciiva.com/129/partnumbering-e-01-129819.pdf?src-supplier=Digi-Key, ComponentLink1URL=https://datasheet.ciiva.com/129/partnumbering-e-01-129819.pdf?src-supplier=Digi-Key, ComponentLink2Description=https://datasheet.ciiva.com/129/partnumbering-e-01-129820.pdf?src-supplier=Digi-Key, ComponentLink2URL=https://datasheet.ciiva.com/129/partnumbering-e-01-129820.pdf?src-supplier=Digi-Key, ComponentLink3Description=https://datasheet.ciiva.com/129/partnumbering-e-01-129821.pdf?src-supplier=Digi-Key, ComponentLink3URL=https://datasheet.ciiva.com/129/partnumbering-e-01-129821.pdf?src-supplier=Digi-Key, ComponentLink4Description=https://datasheet.ciiva.com/19476/1855887-19476237.pdf?src-supplier=Jameco, ComponentLink4URL=https://datasheet.ciiva.com/19476/1855887-19476237.pdf?src-supplier=Jameco, ComponentLink5Description=https://datasheet.ciiva.com/18184/getdatasheetpartid-91958-18184166.pdf?src-supplier=Verical, ComponentLink5URL=https://datasheet.ciiva.com/18184/getdatasheetpartid-91958-18184166.pdf?src-supplier=Verical, ComponentLink6Description=https://datasheet.ciiva.com/11787/0900766b807a1cab-11787097.pdf?src-supplier=RSComponents, ComponentLink6URL=https://datasheet.ciiva.com/11787/0900766b807a1cab-11787097.pdf?src-supplier=RSComponents, ComponentLink7Description=https://datasheet.ciiva.com/6068/1747431-6068159.pdf?src-supplier=Farnell, ComponentLink7URL=https://datasheet.ciiva.com/6068/1747431-6068159.pdf?src-supplier=Farnell, ComponentLink8Description=https://datasheet.ciiva.com/11607/c02e-11607480.pdf?src-supplier=Avnet, ComponentLink8URL=https://datasheet.ciiva.com/11607/c02e-11607480.pdf?src-supplier=Avnet, ComponentLink9Description=https://datasheet.ciiva.com/14116/grmseries-tc-hitype-eng-14116856.pdf?src-supplier=Distrelec, ComponentLink9URL=https://datasheet.ciiva.com/14116/grmseries-tc-hitype-eng-14116856.pdf?src-supplier=Distrelec, ComponentLink10Description=https://datasheet.ciiva.com/14116/grmseries-tc-hitype-eng-14116917.pdf?src-supplier=Distrelec, ComponentLink10URL=https://datasheet.ciiva.com/14116/grmseries-tc-hitype-eng-14116917.pdf?src-supplier=Distrelec, ComponentLink11Description=https://datasheet.ciiva.com/7828/1747431-7828813.pdf?src-supplier=Element14, ComponentLink11URL=https://datasheet.ciiva.com/7828/1747431-7828813.pdf?src-supplier=Element14, ComponentLink12Description=https://datasheet.ciiva.com/7828/1747431-7828815.pdf?src-supplier=Element14, ComponentLink12URL=https://datasheet.ciiva.com/7828/1747431-7828815.pdf?src-supplier=Element14, Construction=Flat, Depth=0.5mm, Height=0.5mm, Lead Free="Lead Free", Length=1mm, Manufacturer Part Number=GRM1555C1H100JZ01D, Mount="Surface Mount", Number of Pins=2, Packaging="Tape and Reel", Pricing 1="1 = 37.68000, 3 = 28.53000 (GBP)", Radiation Hardening=No, REACH SVHC="No SVHC", RoHS=Yes, RoHS Compliant=Yes, Series=GRM, Size=0.5mm, Stock 1=0, Supplier 1=Farnell, Termination=SMD/SMT, Thickness=0.022inch, Voltage Rating=50V, Voltage Rating (DC)=50V, Width=0.5mm
C28 C29: library part C1005C0G1H240J, "CAP CER 24PF 50V C0G 0402", Capacitance=24pF, Case Code (Imperial)=0402, Case Code (Metric)=1005, Dielectric=C0G, Dielectric Material=Ceramic, Manufacturer=TDK, Max Operating Temperature=125°C, Min Operating Temperature=-55°C, Package Quantity=1, Supplier Part Number 1=87R3204, Tolerance=5%, Voltage Rating=50V, Case/Package=0402, ComponentLink1Description=https://datasheet.ciiva.com/161/c-series-generalappl-b11-161778.pdf?src-supplier=Digi-Key, ComponentLink1URL=https://datasheet.ciiva.com/161/c-series-generalappl-b11-161778.pdf?src-supplier=Digi-Key, ComponentLink2Description=https://datasheet.ciiva.com/161/c-series-generalappl-b11-161779.pdf?src-supplier=Digi-Key, ComponentLink2URL=https://datasheet.ciiva.com/161/c-series-generalappl-b11-161779.pdf?src-supplier=Digi-Key, ComponentLink3Description=https://datasheet.ciiva.com/161/c-series-generalappl-b11-161780.pdf?src-supplier=Digi-Key, ComponentLink3URL=https://datasheet.ciiva.com/161/c-series-generalappl-b11-161780.pdf?src-supplier=Digi-Key, ComponentLink4Description=https://datasheet.ciiva.com/5418/mlcc-commercial-general-en-5418382.pdf?src-supplier=Mouser, ComponentLink4URL=https://datasheet.ciiva.com/5418/mlcc-commercial-general-en-5418382.pdf?src-supplier=Mouser, Construction=Flat, Height=0.5mm, Length=0.039inch, Manufacturer Part Number=C1005C0G1H240J, Mount="Surface Mount", Number of Pins=2, Packaging="Tape and Reel", Resistor Type=Ceramic, RoHS=Yes, Series=C, Stock 1=0, Supplier 1=Newark, Termination=SMD/SMT, Thickness=0.022inch, Voltage Rating (DC)=50V, Width=0.02inch
D1: "RGB LED", Color=Blue,Green,Red, Forward Voltage=3.3V, Manufacturer=Everlight, Manufacturer Part Number=18-038/RSGHBHC1-S03/2T, Manufacturer_Name="ROHM Semiconductor", Manufacturer_Part_Number=SMLP34RGB2W3, Mouser Part Number=755-SMLP34RGB2W3, RS Part Number=1246883P, Supplier Part Number 1=18-038/RSGHBHC1-S03-2T, ComponentLink1Description=http://www.everlight.com/datasheets/18-038-RSGHBHC1-S01-2T.pdf?src-supplier=Avnet, ComponentLink1URL=http://www.everlight.com/datasheets/18-038-RSGHBHC1-S01-2T.pdf?src-supplier=Avnet, Datasheet Link=https://datasheet.lcsc.com/lcsc/1811021521_Everlight-Elec-18-038BT-BDGAR6S1-S06-10T_C142314.pdf, Height=0.25mm, LCSC Price/Stock=https://lcsc.com/product-detail/Light-Emitting-Diodes-LED_RGB_C142314.html, Lead Free="Lead Free", Lens Style=Clear, Price=0.08, RoHS=No, RoHS Compliant=Yes, Stock 1=0, Supplier 1=Avnet
D4: library part LTST-C171GKT, "LED GREEN CLEAR CHIP SMD", Case Code (Imperial)=0805, Case Code (Metric)=2012, Forward Current=30mA, Forward Voltage=2.1V, Lens Color=Colorless, Manufacturer="Vishay Lite-On", Max Operating Temperature=85°C, Min Operating Temperature=-55°C, Package Quantity=1, Power Dissipation=100mW, Reverse Voltage=5V, Supplier Part Number 1=160-1423-1-ND, Test Current=10mA, Case/Package=0805, Color=Green, ComponentLink1Description=https://datasheet.ciiva.com/12400/lite-on-ltst-c171gkt-190133-12400647.pdf?src-supplier=Mouser, ComponentLink1URL=https://datasheet.ciiva.com/12400/lite-on-ltst-c171gkt-190133-12400647.pdf?src-supplier=Mouser, ComponentLink2Description=https://datasheet.ciiva.com/2110/ltst-c171gkt-2110000.pdf?src-supplier=Digi-Key, ComponentLink2URL=https://datasheet.ciiva.com/2110/ltst-c171gkt-2110000.pdf?src-supplier=Digi-Key, ComponentLink3Description=https://datasheet.ciiva.com/11773/0900766b80dc0296-11773991.pdf?src-supplier=RSComponents, ComponentLink3URL=https://datasheet.ciiva.com/11773/0900766b80dc0296-11773991.pdf?src-supplier=RSComponents, ComponentLink4Description=https://datasheet.ciiva.com/2110/ltst-c171gkt-2110001.pdf?src-supplier=Digi-Key, ComponentLink4URL=https://datasheet.ciiva.com/2110/ltst-c171gkt-2110001.pdf?src-supplier=Digi-Key, ComponentLink5Description=https://datasheet.ciiva.com/2110/ltst-c171gkt-2110002.pdf?src-supplier=Digi-Key, ComponentLink5URL=https://datasheet.ciiva.com/2110/ltst-c171gkt-2110002.pdf?src-supplier=Digi-Key, ComponentLink6Description=https://datasheet.ciiva.com/16396/ltst-c171gkt-16396549.pdf?src-supplier=Future+Electronics, ComponentLink6URL=https://datasheet.ciiva.com/16396/ltst-c171gkt-16396549.pdf?src-supplier=Future+Electronics, Depth=1.25mm, Dominant Wavelength=569nm, Height=0.8mm, Illumination Color=Green, Lead Free="Lead Free", Length=2mm, Lens Style=Diffused, Lens Transparency=Clear, Luminous Intensity=12mcd, Manufacturer Part Number=LTST-C171GKT, Mount="Surface Mount", Number of Elements=1, Number of LEDs=1, Number of Pins=2, Packaging="Tape and Reel", Power Rating=100mW, Pricing 1="1 = 0.26000, 10 = 0.14100, 100 = 0.06560, 500 = 0.06060, 1000 = 0.04747 (USD)", Radiation Hardening=No, RoHS=Yes, RoHS Compliant=Yes, Series="CHIPLED 0805", Stock 1=10, Supplier 1=Digi-Key, Viewing Angle=130°, Wavelength=585nm, Width=1.25mm
H1 H10 H11 H12 H13 H14 H15 H17 H18 H19 H20 H21 H22 H23: "Pads header que aparecen en la tiva"
H24/25: "Header, 2-Pin", LatestRevisionDate=17-Jul-2002, LatestRevisionNote="Re-released for DXP Platform.", Publisher="Altium Limited"
J1 J2: library part SSW-110-23-S-D, "Conn Socket Strip SKT 20 POS 2.54mm Solder ST Thru-Hole", Manufacturer=Samtec, ComponentLink1Description=ftp://ftp.samtec.com/webfiles/PDF/SSQ_TH.PDF?src-supplier=Avnet, ComponentLink1URL=ftp://ftp.samtec.com/webfiles/PDF/SSQ_TH.PDF?src-supplier=Avnet, Contact Plating=Gold, Gender=Female, Manufacturer Part Number=SSW-110-23-S-D, Mount="Through Hole", Number of Contacts=20, Number of Rows=2, Packaging=Bulk, Pitch=2.54mm, Pricing 1="1 = 5.20000, 10 = 4.99000, 50 = 4.99000, 100 = 4.16000, 1000 = 3.01000, 10000 = 2.76000 (USD)", Radiation Hardening=No, RoHS=Yes, RoHS Compliant=Yes, Stock 1=82, Supplier 1=Mouser, Termination=Solder
J5: "Plug-Of-Nailsâ„¢ Adapter Cable", Package=None, Availability=Unavailable, MF="Tag-Connect LLC", MP=TC2050-IDC-NL, Price=None, SnapEDA_Link=https://www.snapeda.com/parts/TC2050-IDC-NL/Tag-Connect%20LLC/view-part/134534/?ref=snap
J9 J11: "USB Connectors MICRO B RECEPT RA SMT BTTM MNT", Current Rating=1A, Flammability Rating="UL94 V-0", Manufacturer=Hirose, Manufacturer Part Number=ZX62-B-5PA(11), Max Operating Temperature=85°C, Max Voltage Rating (AC)=30V, Min Operating Temperature=-30°C, Package Quantity=3500, Supplier Part Number 1=1645325, ComponentLink1Description=https://datasheet.ciiva.com/11731/0900766b80d9c4df-11731324.pdf?src-supplier=RSComponents, ComponentLink1URL=https://datasheet.ciiva.com/11731/0900766b80d9c4df-11731324.pdf?src-supplier=RSComponents, ComponentLink2Description=https://datasheet.ciiva.com/15181/getdatasheetpartid-449685-15181366.pdf?src-supplier=Verical, ComponentLink2URL=https://datasheet.ciiva.com/15181/getdatasheetpartid-449685-15181366.pdf?src-supplier=Verical, ComponentLink3Description=https://datasheet.ciiva.com/7646/81390-7646778.pdf?src-supplier=Element14, ComponentLink3URL=https://datasheet.ciiva.com/7646/81390-7646778.pdf?src-supplier=Element14, ComponentLink4Description=http://www.farnell.com/datasheets/2691174.pdf?src-supplier=Farnell, ComponentLink4URL=http://www.farnell.com/datasheets/2691174.pdf?src-supplier=Farnell, ComponentLink5Description=https://www.hirose.com/product/en/download_file/key_name/ZX62-B-5PA%2833%29/category/Specification%20Sheet/doc_file_id/87473/?file_category_id=9&item_id=02420033833&is_series=&src-supplier=Digi-Key, ComponentLink5URL=https://www.hirose.com/product/en/download_file/key_name/ZX62-B-5PA%2833%29/category/Specification%20Sheet/doc_file_id/87473/?file_category_id=9&item_id=02420033833&is_series=&src-supplier=Digi-Key, ComponentLink6Description=http://www.farnell.com/datasheets/2691174.pdf?src-supplier=Newark, ComponentLink6URL=http://www.farnell.com/datasheets/2691174.pdf?src-supplier=Newark, ComponentLink7Description=http://www.farnell.com/datasheets/2691174.pdf?src-supplier=Element14, ComponentLink7URL=http://www.farnell.com/datasheets/2691174.pdf?src-supplier=Element14, ComponentLink8Description=http://www.farnell.com/datasheets/2060515.pdf?src-supplier=Element14, ComponentLink8URL=http://www.farnell.com/datasheets/2060515.pdf?src-supplier=Element14, Connector Type=USB,Receptacle, Contact Material="Copper Alloy", Contact Plating=Gold, Depth=5.6mm, Gender=Receptacle, Lead Free="Lead Free", Length=7.9mm, Mating Cycles=10000, Mount="Surface Mount,Horizontal", Number of Contacts=5, Number of Ports=1, Number of Positions=5, Number of Terminals/Pins=5, Orientation="Right Angle", Packaging="Tape and Reel", Pitch=0.65mm, Pricing 1="10 = 0.60800, 50 = 0.48000, 100 = 0.44900, 250 = 0.43000, 500 = 0.39100, 1000 = 0.35900 (GBP)", Pricing 2="1 = 0.61000, 10 = 0.57200, 50 = 0.57200, 100 = 0.46800, 1000 = 0.37700, 10000 = 0.33800 (USD)", Radiation Hardening=No, REACH SVHC="No SVHC", RoHS=Yes, RoHS Compliant=Yes, Series=ZX62, Stock 1=0, Stock 2=45031, Supplier 1=Farnell, Supplier 2=Mouser, Supplier Part Number 2=798-ZX62-B-5PA33, Termination=Solder, USB Standard="USB 2.0", Voltage Rating=30V, Voltage Rating (AC)=30V
Q1 Q2 Q3: "Trans Digital BJT NPN 50V 100mA 3-Pin SOT-416 T/R", Case/Package=SOT-416, Collector Emitter Breakdown Voltage=50V, Collector Emitter Saturation Voltage=250mV, Continuous Collector Current=100mA, Current Rating=70mA, Manufacturer="ON Semiconductor", Max Operating Temperature=150°C, Max Power Dissipation=200mW, Min Operating Temperature=-55°C, Output Voltage=300mV, Package Quantity=1, Supplier Part Number 1=863-DTC114EET1G, Collector Emitter Voltage (VCEO)=50V, Collector-emitter Voltage-Max=250mV, ComponentLink1Description=https://datasheet.ciiva.com/15139/getdatasheetpartid-32044-15139553.pdf?src-supplier=Verical, ComponentLink1URL=https://datasheet.ciiva.com/15139/getdatasheetpartid-32044-15139553.pdf?src-supplier=Verical, ComponentLink2Description=https://datasheet.ciiva.com/989/dtc114e-d-989078.pdf?src-supplier=Digi-Key, ComponentLink2URL=https://datasheet.ciiva.com/989/dtc114e-d-989078.pdf?src-supplier=Digi-Key, ComponentLink3Description=https://datasheet.ciiva.com/989/dtc114e-d-989079.pdf?src-supplier=Digi-Key, ComponentLink3URL=https://datasheet.ciiva.com/989/dtc114e-d-989079.pdf?src-supplier=Digi-Key, ComponentLink4Description=https://datasheet.ciiva.com/989/dtc114e-d-989080.pdf?src-supplier=Digi-Key, ComponentLink4URL=https://datasheet.ciiva.com/989/dtc114e-d-989080.pdf?src-supplier=Digi-Key, ComponentLink5Description=https://datasheet.ciiva.com/11210/dtc124e-d-11210255.pdf?src-supplier=Avnet, ComponentLink5URL=https://datasheet.ciiva.com/11210/dtc124e-d-11210255.pdf?src-supplier=Avnet, ComponentLink6Description=https://datasheet.ciiva.com/16349/dtc114e-d-16349642.pdf?src-supplier=Future+Electronics, ComponentLink6URL=https://datasheet.ciiva.com/16349/dtc114e-d-16349642.pdf?src-supplier=Future+Electronics, ComponentLink7Description=https://datasheet.ciiva.com/22661/1813827-22661178.pdf?src-supplier=Element14, ComponentLink7URL=https://datasheet.ciiva.com/22661/1813827-22661178.pdf?src-supplier=Element14, Contact Plating=Tin,Matte, Element Configuration=Single, Halogen Free="Halogen Free", Height=0.75mm, hFE Min=35, Lead Free="Lead Free", Length=1.6mm, Manufacturer Part Number=DTC114EET1G, Max Breakdown Voltage=50V, Max Collector Current=100mA, Max Output Current=100mA, Number of Pins=3, Operating Supply Voltage=50V, Packaging="Tape and Reel", Polarity=NPN, Pricing 1="1 = 0.16000, 10 = 0.14800, 50 = 0.14800, 100 = 0.08100, 1000 = 0.03400, 10000 = 0.02200 (USD)", Radiation Hardening=No, REACH SVHC="No SVHC", RoHS=Yes, RoHS Compliant=Yes, Series=-, Stock 1=385, Supplier 1=Mouser, Voltage Rating (DC)=50V, Width=0.8mm
R1 R2 R9 R10 R11 R12 R13 R14 R16 R20 R26: "Res Thick Film 0603 0 Ohm Jumper Molded SMD Punched Carrier T/R", Case Code (Imperial)=0603, Case Code (Metric)=1608, Manufacturer=Panasonic, Max Operating Temperature=155°C, Max Power Dissipation=100mW, Min Operating Temperature=-55°C, Package Quantity=1, Resistance=0R, Resistor Type="Thick Film", Supplier Part Number 1=4103908, Temperature Coefficient=600ppm/°C, Tolerance=0%, Voltage Rating=75V, Voltage Rating (DC)=50V, Case/Package=0603, ComponentLink1Description=https://datasheet.ciiva.com/11808/0900766b80f806dd-11808207.pdf?src-supplier=RSComponents, ComponentLink1URL=https://datasheet.ciiva.com/11808/0900766b80f806dd-11808207.pdf?src-supplier=RSComponents, ComponentLink2Description=https://datasheet.ciiva.com/27055/1935748-27055113.pdf?src-supplier=Jameco, ComponentLink2URL=https://datasheet.ciiva.com/27055/1935748-27055113.pdf?src-supplier=Jameco, ComponentLink3Description=https://datasheet.ciiva.com/48532/aoa0000ce1-48532165.pdf?src-supplier=Avnet, ComponentLink3URL=https://datasheet.ciiva.com/48532/aoa0000ce1-48532165.pdf?src-supplier=Avnet, ComponentLink4Description=https://datasheet.ciiva.com/5959/1678796-5959707.pdf?src-supplier=Farnell, ComponentLink4URL=https://datasheet.ciiva.com/5959/1678796-5959707.pdf?src-supplier=Farnell, ComponentLink5Description=https://datasheet.ciiva.com/43460/1678796-43460647.pdf?src-supplier=Farnell, ComponentLink5URL=https://datasheet.ciiva.com/43460/1678796-43460647.pdf?src-supplier=Farnell, ComponentLink6Description=https://datasheet.ciiva.com/9198/aoa0000ce1-9198975.pdf?src-supplier=Avnet, ComponentLink6URL=https://datasheet.ciiva.com/9198/aoa0000ce1-9198975.pdf?src-supplier=Avnet, ComponentLink7Description=https://datasheet.ciiva.com/30199/4aoa0000ce1-30199822.pdf?src-supplier=Onlinecomponents.com, ComponentLink7URL=https://datasheet.ciiva.com/30199/4aoa0000ce1-30199822.pdf?src-supplier=Onlinecomponents.com, ComponentLink8Description=https://datasheet.ciiva.com/16758/70255313-16758527.pdf?src-supplier=Allied+Electronics, ComponentLink8URL=https://datasheet.ciiva.com/16758/70255313-16758527.pdf?src-supplier=Allied+Electronics, ComponentLink9Description=https://datasheet.ciiva.com/16834/aoa0000ce1-16834828.pdf?src-supplier=Future+Electronics, ComponentLink9URL=https://datasheet.ciiva.com/16834/aoa0000ce1-16834828.pdf?src-supplier=Future+Electronics, ComponentLink10Description=https://datasheet.ciiva.com/46377/1678796-46377868.pdf?src-supplier=Element14, ComponentLink10URL=https://datasheet.ciiva.com/46377/1678796-46377868.pdf?src-supplier=Element14, ComponentLink11Description=https://datasheet.ciiva.com/28695/1678796-28695833.pdf?src-supplier=Element14, ComponentLink11URL=https://datasheet.ciiva.com/28695/1678796-28695833.pdf?src-supplier=Element14, ComponentLink12Description=https://datasheet.ciiva.com/17215/aoa0000ce1-17215388.pdf?src-supplier=Avnet+Europe, ComponentLink12URL=https://datasheet.ciiva.com/17215/aoa0000ce1-17215388.pdf?src-supplier=Avnet+Europe, Construction=Rectangular, Contact Plating=Tin, Depth=0.8mm, Features="Automotive AEC-Q200", Height=0.45mm, Lead Free="Lead Free", Length=1.6mm, Manufacturer Part Number=ERJ-3GEY0R00V, Military Standard=Not, Mount="Surface Mount", Number of Terminations=2, Packaging="Tape and Reel", Power Rating=100mW, Pricing 1="1 = 0.01920, 50 = 0.01640, 100 = 0.01600, 500 = 0.01500, 1500 = 0.01440 (USD)", Radiation Hardening=No, REACH SVHC="No SVHC", RoHS=Yes, RoHS Compliant=Yes, Series=ERJ, Size Code=0603, Stock 1=910317, Supplier 1="Future Electronics", Technology="THICK FILM", Termination=SMD/SMT, Width=0.031inch
R3 R4 R5 R8 R24 R27: "Res Thick Film 0402 330 Ohm 1% 0.063W(1/16W) ±100ppm/C Pad SMD T/R", Case Code (Imperial)=0402, Case Code (Metric)=1005, Manufacturer="Yageo / Phycomp", Max Operating Temperature=155°C, Max Power Dissipation=63mW, Min Operating Temperature=-55°C, Package Quantity=1, Power Rating=62.5mW, Resistance=330R, Resistance Tolerance=1%, Resistor Type="Thick Film", Supplier Part Number 1=6023220, Temperature Coefficient=100ppm/°C, Voltage Rating=50V, Case/Package=0402, ComponentLink1Description=https://datasheet.ciiva.com/11819/0900766b80c66297-11819490.pdf?src-supplier=RSComponents, ComponentLink1URL=https://datasheet.ciiva.com/11819/0900766b80c66297-11819490.pdf?src-supplier=RSComponents, ComponentLink2Description=https://datasheet.ciiva.com/12656/pyu-rc0402-51-rohs-l-6-r-12656815.pdf?src-supplier=Mouser, ComponentLink2URL=https://datasheet.ciiva.com/12656/pyu-rc0402-51-rohs-l-6-r-12656815.pdf?src-supplier=Mouser, ComponentLink3Description=https://datasheet.ciiva.com/2453/pyu-r-int-thick-7-2453661.pdf?src-supplier=Digi-Key, ComponentLink3URL=https://datasheet.ciiva.com/2453/pyu-r-int-thick-7-2453661.pdf?src-supplier=Digi-Key, ComponentLink4Description=https://datasheet.ciiva.com/2453/pyu-r-int-thick-7-2453662.pdf?src-supplier=Digi-Key, ComponentLink4URL=https://datasheet.ciiva.com/2453/pyu-r-int-thick-7-2453662.pdf?src-supplier=Digi-Key, ComponentLink5Description=https://datasheet.ciiva.com/2453/pyu-r-int-thick-7-2453663.pdf?src-supplier=Digi-Key, ComponentLink5URL=https://datasheet.ciiva.com/2453/pyu-r-int-thick-7-2453663.pdf?src-supplier=Digi-Key, ComponentLink6Description=https://datasheet.ciiva.com/7849/1018594-7849962.pdf?src-supplier=Element14, ComponentLink6URL=https://datasheet.ciiva.com/7849/1018594-7849962.pdf?src-supplier=Element14, ComponentLink7Description=https://datasheet.ciiva.com/7849/1018594-7849963.pdf?src-supplier=Element14, ComponentLink7URL=https://datasheet.ciiva.com/7849/1018594-7849963.pdf?src-supplier=Element14, ComponentLink8Description=https://datasheet.ciiva.com/17083/pyu-rc0402-51-rohs-l-6-r-17083994.pdf?src-supplier=Future+Electronics, ComponentLink8URL=https://datasheet.ciiva.com/17083/pyu-rc0402-51-rohs-l-6-r-17083994.pdf?src-supplier=Future+Electronics, Construction=Rectangular, Depth=0.5mm, Features="Moisture Resistant", Height=0.016inch, Lead Free="Lead Free", Length=0.039inch, Manufacturer Part Number=RC0402FR-07330RL, Military Standard=Not, Number of Terminations=2, Packaging="Tape and Reel", Part Number=RC0402FR-07330RL, Pricing 1="1 = 0.00590, 500 = 0.00300, 1500 = 0.00260, 2500 = 0.00250, 5000 = 0.00230 (USD)", REACH SVHC=Unknown, RoHS=Yes, RoHS Compliant=Yes, Series=RC, Size Code=0402, Stock 1=814184, Supplier 1="Future Electronics", Technology="THICK FILM", Termination=SMD/SMT, Tolerance=1%, Width=0.02inch
R18 R19 R21 R22 R23 R28: "Surface Mount Thick Film Resistor, Rc Series, 10 Kohm, 62.5 Mw, - 1%, 50 V, 0402 [1005 Metric]", Case Code (Imperial)=0402, Case Code (Metric)=1005, Manufacturer=Yageo, Max Operating Temperature=155°C, Max Power Dissipation=63mW, Min Operating Temperature=-55°C, Power Rating=62.5mW, Resistance=10kR, Resistance Tolerance=1%, Resistor Type="Thick Film", Supplier Part Number 1=311-10.0KLRCT-ND, Temperature Coefficient=100ppm/°C, Voltage Rating=50V, Case/Package=0402, ComponentLink1Description=https://datasheet.ciiva.com/7660/38568-7660787.pdf?src-supplier=Element14, ComponentLink1URL=https://datasheet.ciiva.com/7660/38568-7660787.pdf?src-supplier=Element14, ComponentLink2Description=https://datasheet.ciiva.com/12667/pyu-rc0402-51-rohs-l-6-r-12667067.pdf?src-supplier=Mouser, ComponentLink2URL=https://datasheet.ciiva.com/12667/pyu-rc0402-51-rohs-l-6-r-12667067.pdf?src-supplier=Mouser, ComponentLink3Description=https://datasheet.ciiva.com/7849/1784430-7849813.pdf?src-supplier=Element14, ComponentLink3URL=https://datasheet.ciiva.com/7849/1784430-7849813.pdf?src-supplier=Element14, ComponentLink4Description=https://datasheet.ciiva.com/7849/1686128-7849814.pdf?src-supplier=Element14, ComponentLink4URL=https://datasheet.ciiva.com/7849/1686128-7849814.pdf?src-supplier=Element14, ComponentLink5Description=https://datasheet.ciiva.com/7849/1784430-7849815.pdf?src-supplier=Element14, ComponentLink5URL=https://datasheet.ciiva.com/7849/1784430-7849815.pdf?src-supplier=Element14, ComponentLink6Description=https://datasheet.ciiva.com/7983/1018594-7983486.pdf?src-supplier=Element14, ComponentLink6URL=https://datasheet.ciiva.com/7983/1018594-7983486.pdf?src-supplier=Element14, ComponentLink7Description=https://datasheet.ciiva.com/22747/1018594-22747512.pdf?src-supplier=Element14, ComponentLink7URL=https://datasheet.ciiva.com/22747/1018594-22747512.pdf?src-supplier=Element14, Construction=Rectangular, Depth=0.5mm, Features="Moisture Resistant", Height=0.32mm, Lead Free="Lead Free", Lead Pitch=0.2mm, Length=1mm, Manufacturer Part Number=RC0402FR-0710KL, Military Standard=Not, Number of Pins=2, Number of Terminations=2, Packaging="Tape and Reel", Pricing 1="1 = 0.10000, 10 = 0.01600, 100 = 0.00660, 1000 = 0.00299, 2500 = 0.00259, 5000 = 0.00214 (USD)", REACH SVHC="No SVHC", RoHS=Yes, RoHS Compliant=Yes, Series=RC, Stock 1=6227591, Supplier 1=Digi-Key, Termination=SMD/SMT, Tolerance=1%, Voltage Rating (DC)=50V, Width=0.5mm, Working Voltage=50V
R31: "RES SMD 1M OHM 1% 1/16W 0402", Case Code (Imperial)=0402, Case Code (Metric)=1005, Manufacturer=Rohm, Max Operating Temperature=155°C, Max Power Dissipation=63mW, Min Operating Temperature=-55°C, Package Quantity=1, Resistance=1MR, Resistor Type="Thick Film", Supplier Part Number 1=RHM1.00MCDCT-ND, Temperature Coefficient=100ppm/°C, Tolerance=1%, Voltage Rating (DC)=50V, Case/Package=0402, ComponentLink1Description=https://datasheet.ciiva.com/2519/mcr01mrt-seriesspec-2519945.pdf?src-supplier=Digi-Key, ComponentLink1URL=https://datasheet.ciiva.com/2519/mcr01mrt-seriesspec-2519945.pdf?src-supplier=Digi-Key, ComponentLink2Description=https://datasheet.ciiva.com/2519/mcr01mrt-seriesspec-2519946.pdf?src-supplier=Digi-Key, ComponentLink2URL=https://datasheet.ciiva.com/2519/mcr01mrt-seriesspec-2519946.pdf?src-supplier=Digi-Key, ComponentLink3Description=https://datasheet.ciiva.com/2519/mcr01mrt-seriesspec-2519947.pdf?src-supplier=Digi-Key, ComponentLink3URL=https://datasheet.ciiva.com/2519/mcr01mrt-seriesspec-2519947.pdf?src-supplier=Digi-Key, Height=0.016inch, Lead Free="Lead Free", Length=0.039inch, Manufacturer Part Number=MCR01MRTF1004, Number of Terminations=2, Packaging="Tape and Reel", RoHS=Yes, RoHS Compliant=Yes, Series=MCR, Stock 1=0, Supplier 1=Digi-Key, Width=0.02inch
SW1 SW2 SW3: "Sealed Tactile Switch, SPST-NO, 3 to 24 V, -25 to 70 degC, 4-Pin SMD, RoHS, Bulk", Current Rating="50 mA", Manufacturer=Omron, Max Operating Temperature="70 degC", Min Operating Temperature="-25 degC", Package Quantity=1500, Voltage Rating="24 V", ComponentLink1Description="Manufacturer URL", ComponentLink1URL=http://www.omron.com/, ComponentLink2Description=Datasheet, ComponentLink2URL=http://www.omron.com/ecb/products/pdf/en-b3s.pdf, Contact Plating=Silver, DatasheetVersion=10/2014, Height="4.3 mm", Length="6.6 mm", Mount="Surface Mount", Mounting Technology="Surface Mount", PackageDescription="4-Pin Surface Mount Device, Body 6.6 x 6 mm", PackageReference=B3S-1000, Packaging=Bulk, REACH SVHC="No SVHC", RoHSCompliant=true
SW4: "SWITCH SLIDE DPDT 300MA 6V", Contact Current Rating=300mA, Contact Resistance=70mR, Flammability Rating="UL94 V-2", Max Operating Temperature=85°C, Max Voltage Rating (DC)=6V, Min Operating Temperature=-20°C, Package Quantity=1, Actuator Length=2mm, Actuator Material=Nylon, Actuator Type=Standard, Contact Material="Copper Alloy", Contact Plating=Silver, Current Rating=300mA, Depth=7.5mm, Electrical Life=5000Cycles, Housing Material=Nylon, Lead Free="Lead Free", Length=9mm, Max Current Rating=300mA, Mount="Surface Mount", Orientation=Vertical, Packaging="Tape and Reel", Radiation Hardening=No, REACH SVHC="No SVHC", Switch Function=On-On, Switch Travel=2mm, Termination="Gull Wing", Throw Configuration=DPDT, Voltage Rating (DC)=6V